# Altium PCB GATEWAY_PCB.PcbDoc (part 1 of 2)
Units mm, origin at the board's own origin, x right, y up, seen from the top; angles counter-clockwise.
Board outline 98.58 x 95.81 mm, 4 copper layers (SIGNAL_TOP, GND, POWER, SIGNAL_BOTTOM), stack 0.603 mm thick; 207 components, 120 nets, 669 pads, 510 vias.
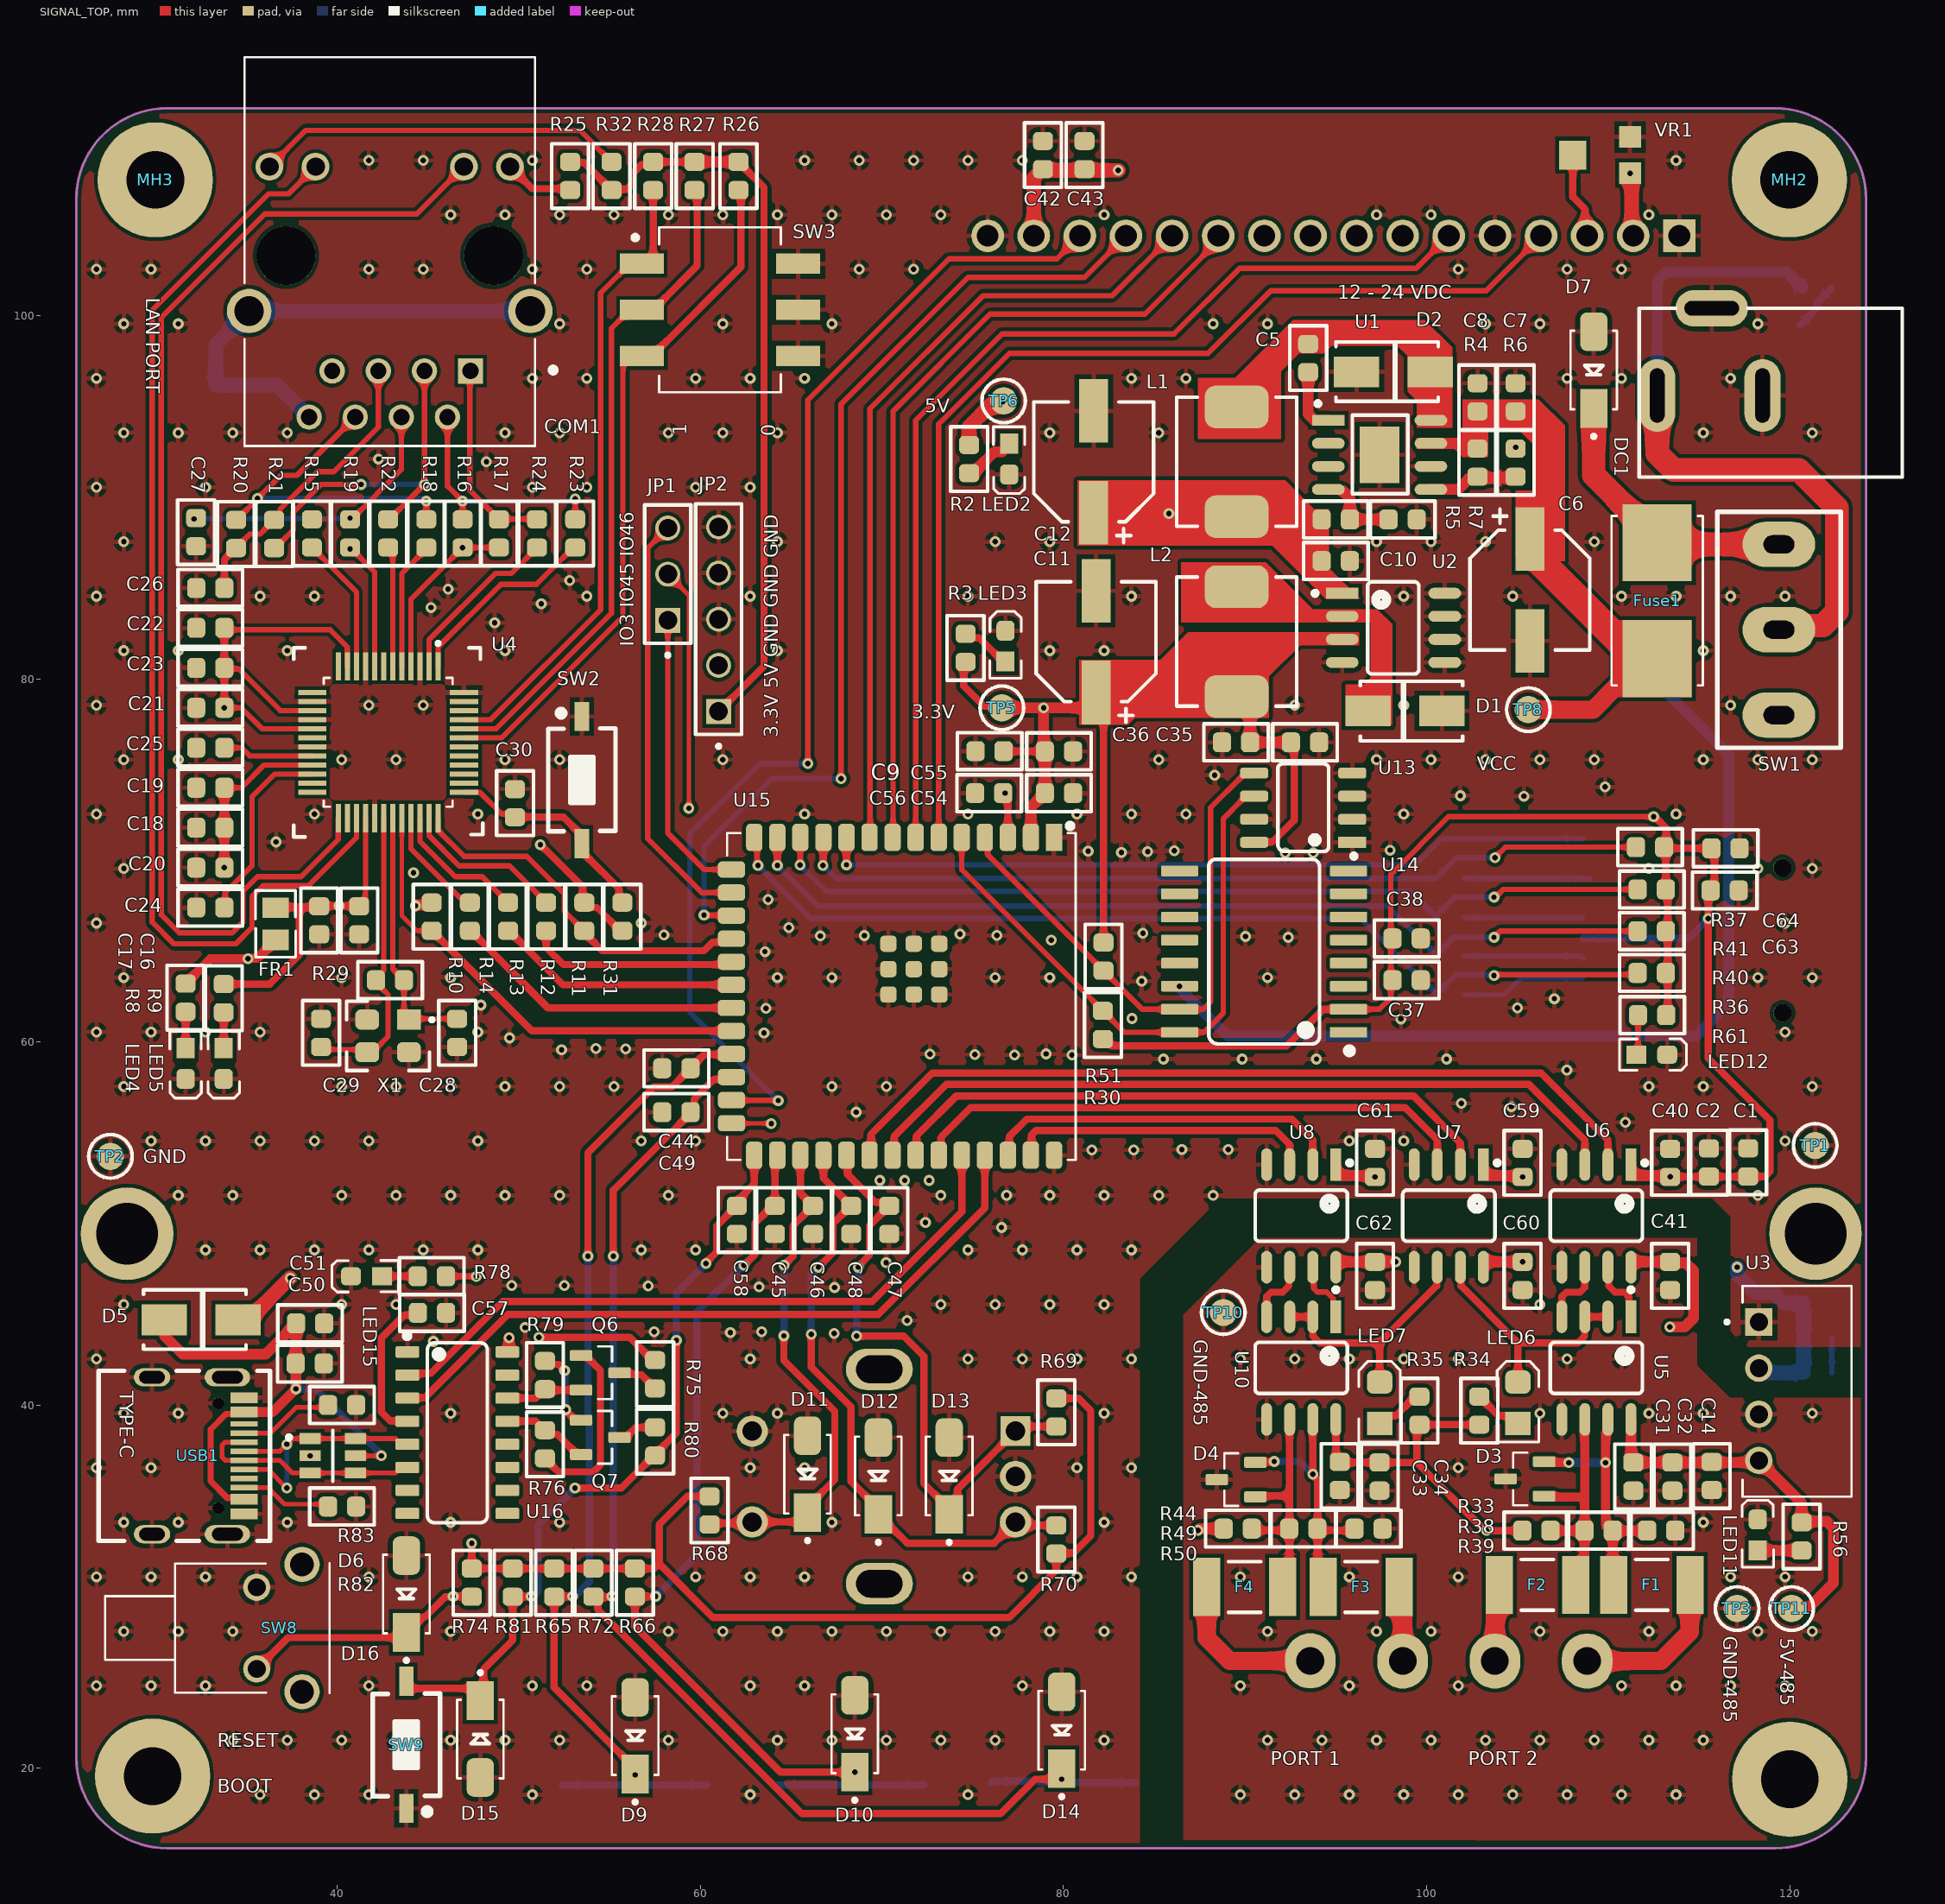
[diagram p0: SIGNAL_TOP view]
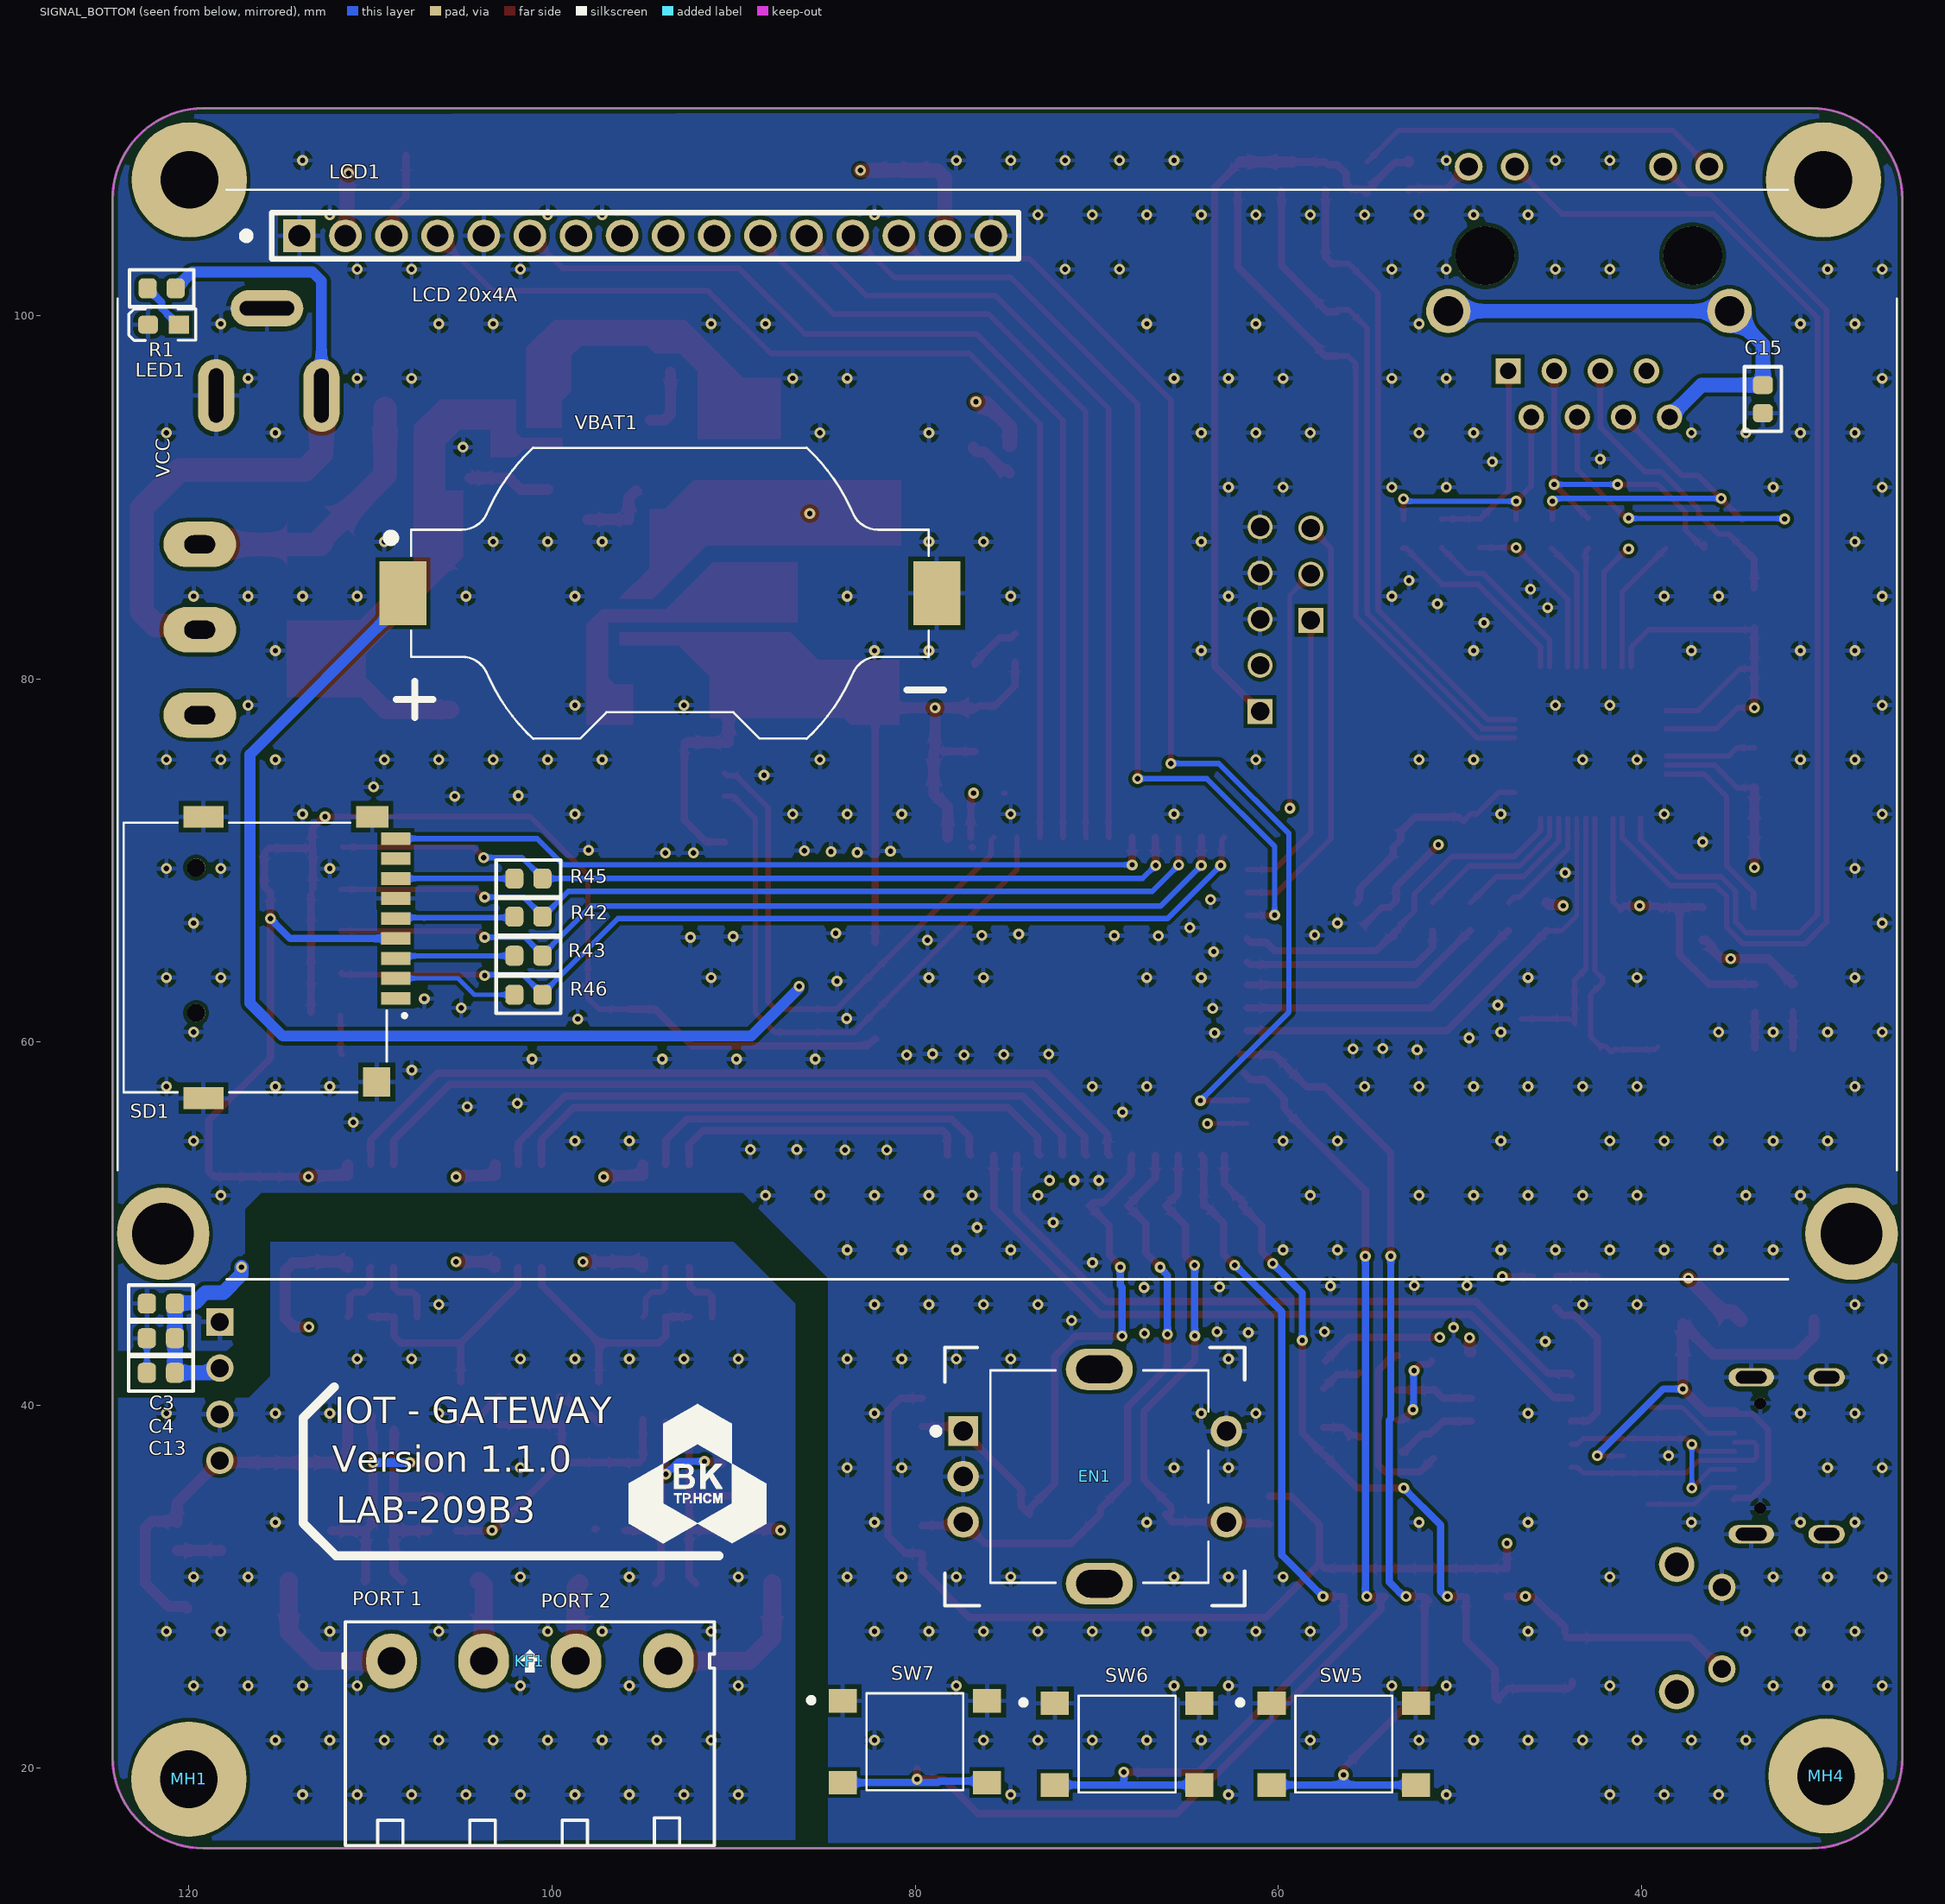
[diagram p1: SIGNAL_BOTTOM view, seen from below]
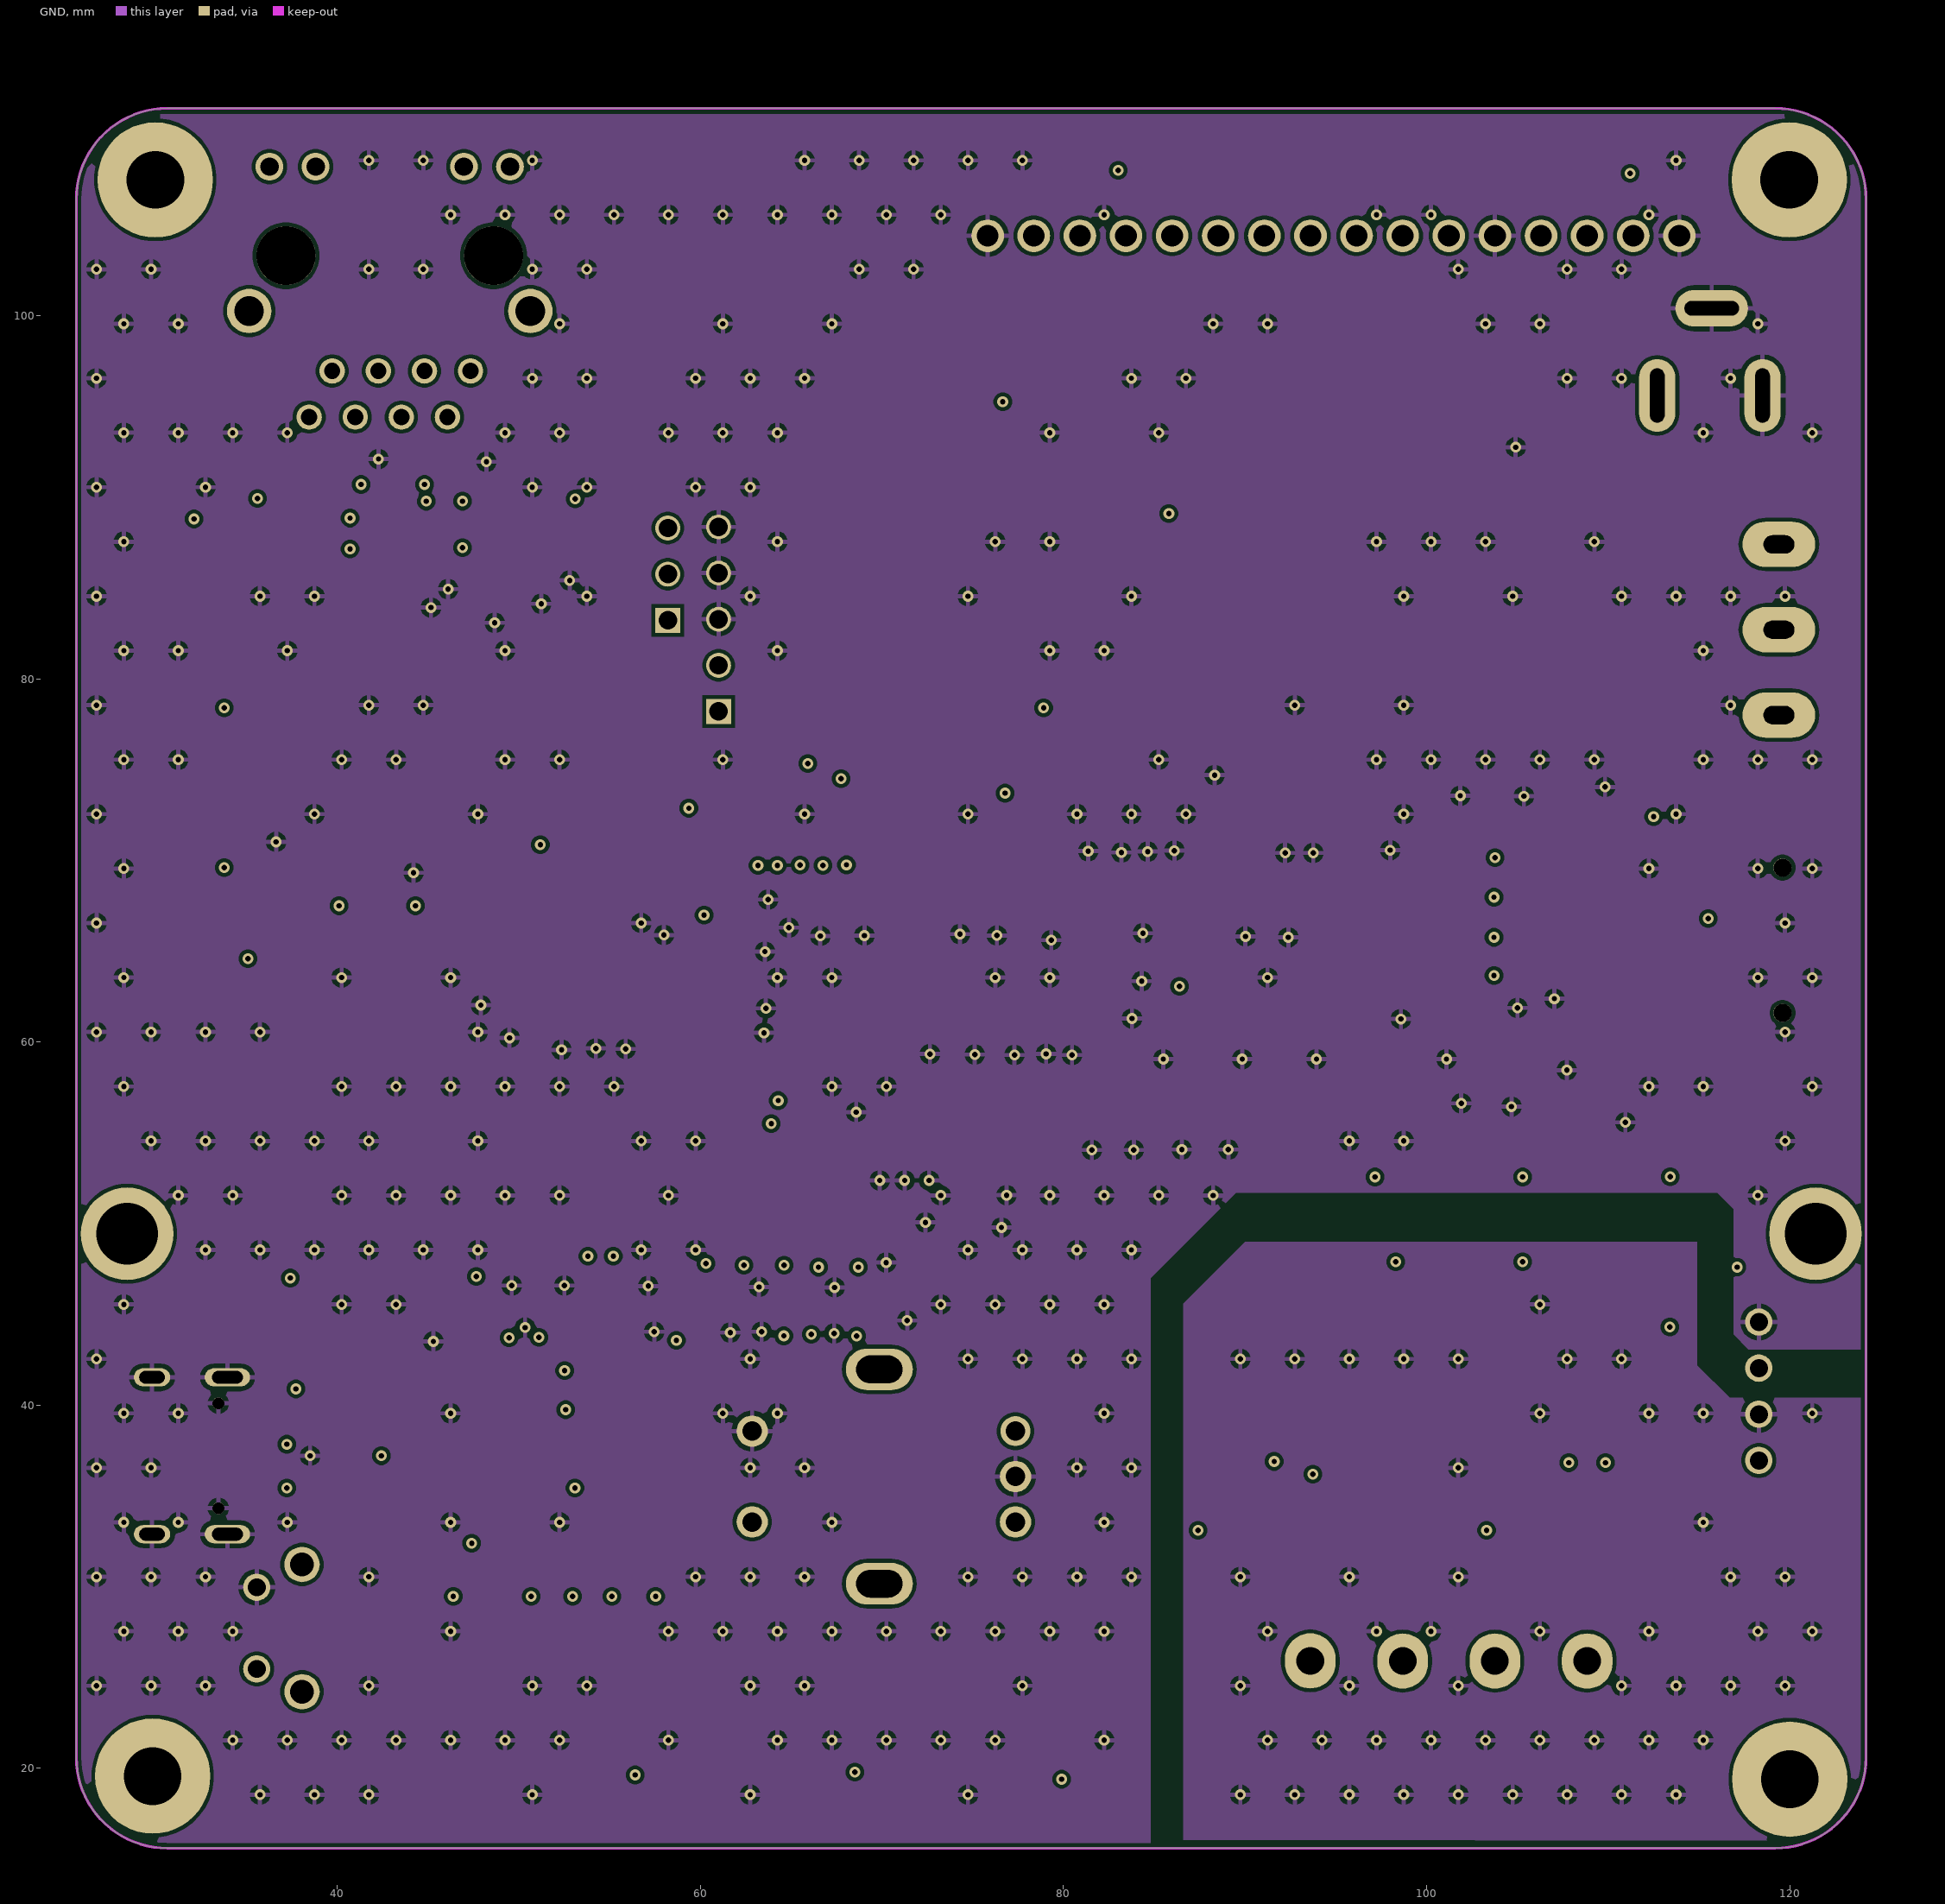
[diagram p2: GND]
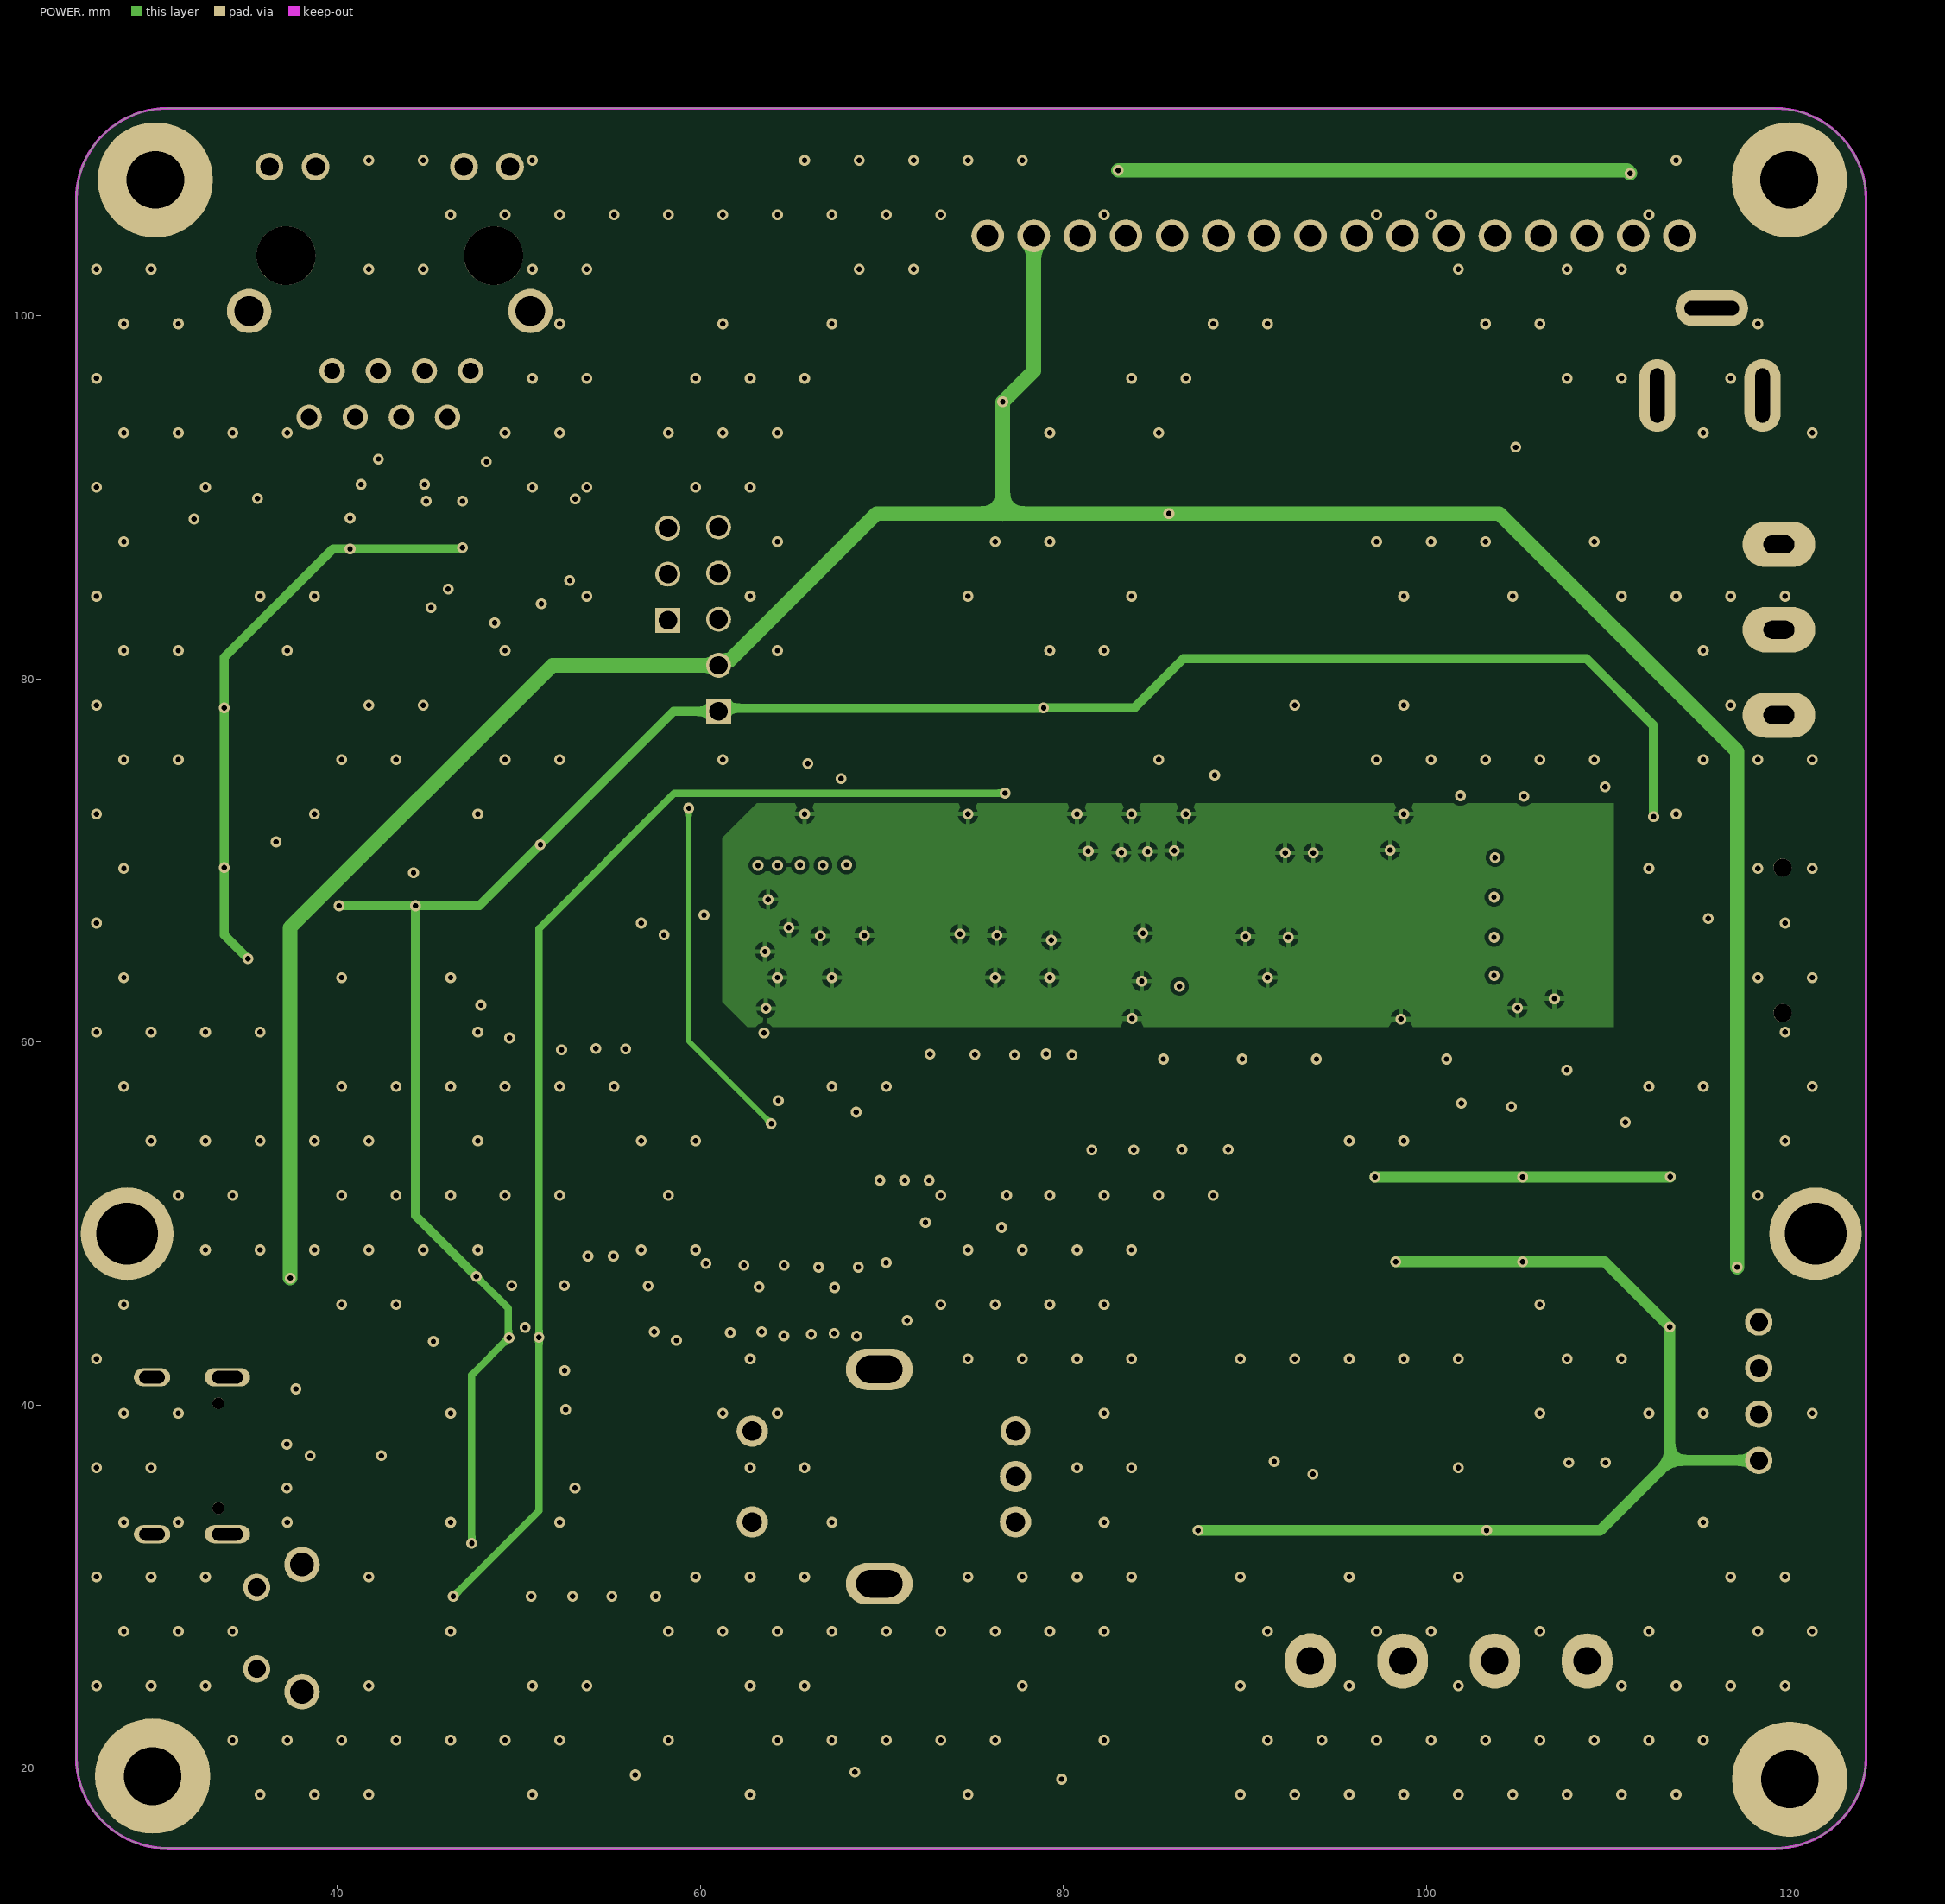
[diagram p3: POWER]

## Layer stack, top to bottom
Top Solder: solder mask 0.0102, Solder Resist, Dk 3.5
SIGNAL_TOP: signal copper 0.0356
Dielectric 2: prepreg 0.0711, PP-006, Dk 4.1
GND: signal copper 0.035
Dielectric 1: dielectric 0.32, FR-4, Dk 4.8
POWER: signal copper 0.035
Dielectric 3: prepreg 0.0711, PP-006, Dk 4.1
SIGNAL_BOTTOM: signal copper 0.0356
Bottom Solder: solder mask 0.0102, Solder Resist, Dk 3.5

## Board outline
25.622,20.6 25.622,106.411 cw(c30.622,106.411) 30.622,111.411 119.2,111.411 cw(c119.2,106.411) 124.2,106.411 124.2,20.6 cw(c119.2,20.6) 119.2,15.6 30.622,15.6 cw(c30.622,20.6)

## Design rules (kind name [scope] priority, off if disabled: settings)
Clearance [All] p1: gap=0.203 ignorepadtopadclearanceinfootprint=TRUE
DiffPairsRouting [All] p1: maxlimit=0.254 minlimit=0.254 mostfreqgap=0.254 toplayer_minwidth=0.254 toplayer_maxwidth=0.381 toplayer_prefwidth=0.381 midlayer1_minwidth=0.254 midlayer1_maxwidth=0.381 midlayer1_prefwidth=0.381 midlayer2_minwidth=0.254 midlayer2_maxwidth=0.381 midlayer2_prefwidth=0.381 bottomlayer_minwidth=0.254 bottomlayer_maxwidth=0.381 bottomlayer_prefwidth=0.381 maxuncoupledlength=12.7
HoleSize [All] p1: absolutevalues=TRUE maxlimit=6.3 minlimit=0.15 maxpercent=80.000 minpercent=20.000
HoleToHoleClearance [All] p1: gap=0.2 allowstackedmicrovias=TRUE
MinimumSolderMaskSliver [All] p1: minsoldermaskwidth=0.05
PolygonConnect [All] p1: connectstyle=Relief reliefconductorwidth=0.254 reliefentries=4 polygonreliefangle="90 Angle" airgapwidth=0.254
RoutingVias [All] p1: holewidth=0.3 width=0.6 viastyle="Through Hole" minholewidth=0.3 minwidth=0.6 maxholewidth=0.8 maxwidth=1
SilkToSilkClearance [All] p1: silktosilkclearance=0.2
SilkToSolderMaskClearance [IsPad] p1: minsilkscreentomaskgap=0.2 clearancetoexposedcopper=TRUE
SolderMaskExpansion [All] p1: expansion=0.102 istentingtop=FALSE
SupplyNets "Schematic Supply Nets_3" [InNet('VIN')] p1: voltage=0.000
SupplyNets "Schematic Supply Nets_10" [InNet('+VCC')] p2: voltage=0.000
SupplyNets "Schematic Supply Nets_9" [InNet('+5V_RS485')] p3: voltage=0.000
SupplyNets "Schematic Supply Nets_8" [InNet('+3.3V')] p4: voltage=0.000
SupplyNets "Schematic Supply Nets_5" [InNet('GND')] p5: voltage=0.000
SupplyNets "Schematic Supply Nets" [InNet('+5V')] p6: voltage=0.000
SupplyNets "Schematic Supply Nets_7" [InNet('+3.3V_RJ45')] p7: voltage=0.000
SupplyNets "Schematic Supply Nets_6" [InNet('VBAT')] p8: voltage=0.000
SupplyNets "Schematic Supply Nets_4" [InNet('VBUS')] p9: voltage=0.000
SupplyNets "Schematic Supply Nets_2" [InNet('GND_RS485')] p10: voltage=0.000
SupplyNets "Schematic Supply Nets_1" [InNet('GND_RJ45')] p11: voltage=0.000
UnRoutedNet [All] p1: checkbadconnections=TRUE
Width [All] p1: maxlimit=1.5 minlimit=0.25 preferedwidth=0.4
23 further rules are at their usual default settings.

## Classes and differential pairs
component class User_Interface: C42 C43 C44 C45 C46 C47 C48 C49 D9 D10 D11 D12 D13 D14 EN1 LCD1 R65 R66 R68 R69 R70 R72 SW5 SW6 SW7 VR1
component class RTC_and_EEPROM: c9 C35 C36 C37 C38 C63 C64 LED12 MH1 MH2 MH3 MH4 R30 R36 R37 R40 R41 R42 R43 R45 R46 R51 R61 SD1 U13 U14
component class RS485_Port: C31 C32 C33 C34 C40 C41 C59 C60 C61 C62 D3 D4 F1 F2 F3 F4 KF1 LED6 LED7 LED11 R33 R34 R35 R38 R39 R44 R49 R50 R56 TP10 TP11 U5 U6 U7 U8 U10
component class Power_Supply: C1 C2 C3 C4 C5 C6 C7 C8 C10 C11 C12 C13 C14 D1 D2 D7 DC1 Fuse1 L1 L2 LED1 LED2 LED3 R1 R2 R3 R4 R5 R6 R7 SW1 TP1 TP2 TP3 TP5 TP6 TP8 U1 U2 U3 VBAT1 VCC
component class MCU: C50 C51 C54 C55 C56 C57 C58 D5 D6 D15 D16 JP1 JP2 LED15 Q6 Q7 R74 R75 R76 R78 R79 R80 R81 R82 R83 SW8 SW9 U15 U16 USB1
component class Ethernet: C15 C16 C17 C18 C19 C20 C21 C22 C23 C24 C25 C26 C27 C28 C29 C30 COM1 FR1 LED4 LED5 R8 R9 R10 R11 R12 R13 R14 R15 R16 R17 R18 R19 R20 R21 R22 R23 R24 R25 R26 R27 R28 R29 R31 R32 SW2 SW3 U4 X1
differential pair DATA_D: +DATA_D_P -DATA_D_N

## Components (designator, comment, footprint, x,y, rotation, side; value= is the part's Value field where it differs from the comment)
C1 "10uF/50V" "CAP - 0603" 117.707,53.367 r90 top
C2 "0.1uF/50V" "CAP - 0603" 115.55,53.362 r90 top
C3 "10uF/50V" "CAP - 0603" 121.539,45.593 r0 bottom
C4 "0.1uF/50V" "CAP - 0603" 121.539,43.688 r0 bottom
C5 "10nF/50V" "CAP - 0603" 93.472,97.663 r90 top
C6 "100uF/35V" ALU_CAP_6.3_7.7 105.689,84.887 r270 top
C7 "4.7uF/50V" "CAP - 0603" 104.9,95.5 r90 top
C8 "4.7uF/50V" "CAP - 0603" 102.8,95.5 r90 top
C9 "10uF/50V" "CAP - 0603" 75.923,76.017 r0 top
C10 "10uF/50V" "CAP - 0603" 94.996,86.487 r0 top
C11 "330uF/6.3V" ALU_CAP_6.3_7.7 81.788,82.042 r90 top
C12 "220uF/16V" ALU_CAP_6.3_7.7 81.661,91.948 r90 top
C13 "4.7uF/50V" "CAP - 0603" 121.539,41.783 r0 bottom
C14 "10uF/50V" "CAP - 0603" 115.7,36.1 r270 top
C15 "1nF/50V" "CAP - 0603" 33.3,95.4 r90 bottom
C16 "10uF/50V" "CAP - 0603" 41.2,66.7 r90 top
C17 "100nF/50V" "CAP - 0603" 39,66.7 r90 top
C18 "100nF/50V" "CAP - 0603" 33,71.8 r0 top
C19 "100nF/50V" "CAP - 0603" 33,74 r0 top
C20 "100nF/50V" "CAP - 0603" 33,69.6 r0 top
C21 "100nF/50V" "CAP - 0603" 33,78.4 r0 top
C22 "100nF/50V" "CAP - 0603" 33,82.8 r0 top
C23 "100nF/50V" "CAP - 0603" 33,80.6 r0 top
C24 "10nF/50V" "CAP - 0603" 33,67.4 r0 top
C25 "4.7uF/50V" "CAP - 0603" 33,76.2 r0 top
C26 "10nF/50V" "CAP - 0603" 33,85 r0 top
C27 "22nF/50V" "CAP - 0603" 32.219,88.069 r90 top
C28 "18pF/50V" "CAP - 0603" 46.6,60.5 r90 top
C29 "18pF/50V" "CAP - 0603" 39.1,60.5 r270 top
C30 "0.1uF/50V" "CAP - 0603" 49.784,73.152 r270 top
C31 "0.1uF/50V" "CAP - 0603" 111.379,36.068 r270 top
C32 "10uF/50V" "CAP - 0603" 113.538,36.068 r270 top
C33 "0.1uF/50V" "CAP - 0603" 95.212,36.101 r270 top
C34 "10uF/50V" "CAP - 0603" 97.409,36.068 r270 top
C35 "10uF/50V" "CAP - 0603" 93.3,76.5 r180 top
C36 "0.1uF/50V" "CAP - 0603" 89.5,76.5 r0 top
C37 "10uF/50V" "CAP - 0603" 98.9,63.4 r180 top
C38 "0.1uF/50V" "CAP - 0603" 98.9,65.7 r180 top
C40 "0.1uF/50V" "CAP - 0603" 113.411,53.34 r90 top
C41 "0.1uF/50V" "CAP - 0603" 113.411,47.117 r270 top
C42 "10uF/50V" "CAP - 0603" 78.867,108.839 r270 top
C43 "0.1uF/50V" "CAP - 0603" 81.153,108.839 r270 top
C44 "0.1uF/50V" "CAP - 0603" 58.674,58.547 r0 top
C45 "0.1uF/50V" "CAP - 0603" 64.1,50.2 r90 top
C46 "0.1uF/50V" "CAP - 0603" 66.2,50.2 r90 top
C47 "0.1uF/50V" "CAP - 0603" 70.4,50.2 r90 top
C48 "0.1uF/50V" "CAP - 0603" 68.3,50.2 r90 top
C49 "0.1uF/50V" "CAP - 0603" 58.674,56.134 r0 top
C50 "0.1uF/50V" "CAP - 0603" 38.481,42.291 r180 top
C51 "10uF/50V" "CAP - 0603" 38.5,44.5 r180 top
C54 "10uF/50V" "CAP - 0603" 79.748,73.7 r180 top
C55 "0.1uF/50V" "CAP - 0603" 79.748,76 r180 top
C56 "0.1uF/50V" "CAP - 0603" 75.9,73.7 r0 top
C57 "100nF/50V" "CAP - 0603" 45.212,45.085 r180 top
C58 "0.1uF/50V" "CAP - 0603" 62,50.2 r90 top
C59 "0.1uF/50V" "CAP - 0603" 105.283,53.34 r90 top
C60 "0.1uF/50V" "CAP - 0603" 105.283,47.117 r270 top
C61 "0.1uF/50V" "CAP - 0603" 97.155,53.34 r90 top
C62 "0.1uF/50V" "CAP - 0603" 97.155,47.117 r270 top
C63 "10uF/50V" "CAP - 0603" 116.414,68.343 r180 top
C64 "0.1uF/50V" "CAP - 0603" 116.462,70.663 r180 top
COM1 "RJ45" RJ45 42.885,103.3 r0 top
D1 "SS54" SS54 98.806,78.232 r180 top
D2 "SS54" SS54 98.171,96.901 r0 top
D3 "SM712-02HTG" SOT23-3 105.41,35.941 r180 top
D4 "SM712-02HTG" SOT23-3 89.5,35.9 r180 top
D5 "SS54" SS54 32.5,44.7 r0 top
D6 "SRV05-4" SOT-23-6 39.751,37.211 r0 top
D7 "SMAJ28A" DO-214AC 109.2,97 r90 top
D9 "SMAJ5.0A" DO-214AC 56.4,21.8 r90 top
D10 "SMAJ5.0A" DO-214AC 68.5,21.9 r90 top
D11 "SMAJ5.0A" DO-214AC 65.9,36.2 r90 top
D12 "SMAJ5.0A" DO-214AC 69.8,36.1 r90 top
D13 "SMAJ5.0A" DO-214AC 73.7,36.1 r90 top
D14 "SMAJ5.0A" DO-214AC 79.9,22.1 r90 top
D15 "SMAJ5.0A" DO-214AC 47.875,21.611 r270 top
D16 "SMAJ5.0A" DO-214AC 43.8,29.6 r90 top
DC1 "Jack_DC" "DC_5.5 x 2.1mm" 115.6,95.6 r180 top
EN1 "Encoder - EC11" "ENCODER - EC11" 69.85,36.068 r180 bottom
F1 "MF-MSMF020-2" "FUSE 4.55X3.24 MM" 112.4,30.1 r0 top
F2 "MF-MSMF020-2" "FUSE 4.55X3.24 MM" 106.1,30.1 r180 top
F3 "MF-MSMF020-2" "FUSE 4.55X3.24 MM" 96.393,29.988 r0 top
F4 "MF-MSMF020-2" "FUSE 4.55X3.24 MM" 89.975,29.988 r180 top
FR1 "120R" FR-0805 36.6,66.5 r270 top
Fuse1 "Fuse - 4A" SMD-2 112.7,84.3 r270 top
JP1 "JUMP 3 PINS" "JUMP 3 PINS" 58.225,85.76 r90 top locked
JP2 "JUMP 5 PINS" "JUMP 5 PINS" 61,78.2 r90 top locked
KF1 "KF 4 Pins" KF_4 108.839,25.908 r180 bottom
L1 "15uH/3A" L_SMD_0630 89.535,91.948 r270 top
L2 "22uH/3A" L_SMD_0630 89.535,82.042 r270 top
LCD1 "LCD 20x4A" LCD-20X4A-4-HOLES 113.919,104.394 r180 bottom locked
LED1 "RED" RED_LED_0603 121.4,99.5 r0 bottom
LED2 "RED" RED_LED_0603 77,92.1 r270 top
LED3 "GREEN" GREEN_LED_0603 76.8,81.8 r90 top
LED4 "RED" RED_LED_0603 31.64,58.81 r270 top
LED5 "RED" RED_LED_0603 33.74,58.81 r270 top
LED6 "YELLOW" YELLOW_LED_0805 105.029,38.989 r90 top
LED7 "YELLOW" YELLOW_LED_0805 97.409,38.989 r90 top
LED11 "RED" RED_LED_0603 118.238,32.856 r90 top
LED12 "RED" RED_LED_0603 112.4,59.3 r0 top
LED15 "RED_DEBUG" RED_LED_0603 41.6,47.1 r180 top
MH1 "MOUNTING HOLE" "Mounting hole_2"#1 119.975,19.425 r180 bottom
MH2 "MOUNTING HOLE" "Mounting hole_2"#1 120,107.5 r0 top
MH3 "MOUNTING HOLE" "Mounting hole_2"#1 30,107.5 r0 top
MH4 "MOUNTING HOLE" "Mounting hole_2"#2 29.8,19.6 r180 bottom
Q6 "SS8050" SOT23-3 54.483,41.783 r0 top
Q7 "SS8050" SOT23-3 54.483,38.227 r0 top
R1 "10K/1%" "RES - 0603" 121.5,101.5 r0 bottom
R2 "1K/1%" "RES - 0603" 74.8,92.1 r270 top
R3 "330R/1%" "RES - 0603" 74.6,81.7 r90 top
R4 "10K/1%" "RES - 0603" 102.8,91.9 r270 top
R5 "1K/1%" "RES - 0603" 94.996,88.773 r0 top
R6 "1.5K/1%" "RES - 0603" 104.9,91.9 r90 top
R7 "330R/1%" "RES - 0603" 98.679,88.773 r0 top
R8 "330R/1%" "RES - 0603" 31.64,62.435 r270 top
R9 "330R/1%" "RES - 0603" 33.74,62.41 r270 top
R10 "10K/1%" "RES - 0603" 45.2,66.9 r90 top
R11 "10K/1%" "RES - 0603" 53.6,66.9 r90 top
R12 "22R/1%" "RES - 0603" 51.5,66.9 r270 top
R13 "22R/1%" "RES - 0603" 49.4,66.9 r270 top
R14 "22R/1%" "RES - 0603" 47.3,66.9 r270 top
R15 "12.4K/1%" "RES - 0603" 38.6,88 r270 top
R16 "49.9R/1%" "RES - 0603" 46.9,88 r270 top
R17 "49.9R/1%" "RES - 0603" 48.9,88 r270 top
R18 "22R/1%" "RES - 0603" 44.9,88 r90 top
R19 "22R/1%" "RES - 0603" 40.7,88 r90 top
R20 "49.9R/1%" "RES - 0603" 34.419,87.969 r90 top
R21 "49.9R/1%" "RES - 0603" 36.519,87.969 r270 top
R22 "22R/1%" "RES - 0603" 42.8,88 r90 top
R23 "22R/1%" "RES - 0603" 53.1,88 r90 top
R24 "22R/1%" "RES - 0603" 51,88 r90 top
R25 "330R/1%" "RES - 0603" 52.82,107.684 r270 top
R26 "10K/1%" "RES - 0603" 62.091,107.684 r90 top
R27 "10K/1%" "RES - 0603" 59.678,107.684 r90 top
R28 "10K/1%" "RES - 0603" 57.392,107.684 r90 top
R29 "1M/1%" "RES - 0603" 42.9,63.4 r0 top
R30 "4.7K/1%" "RES - 0603" 82.169,60.935 r270 top
R31 "10K/1%" "RES - 0603" 55.7,66.9 r90 top
R32 "330R/1%" "RES - 0603" 55.106,107.684 r90 top
R33 "2.2K/1%" "RES - 0603" 112.916,33.089 r0 top
R34 "1K/1%" "RES - 0603" 102.9,39.7 r90 top
R35 "1K/1%" "RES - 0603" 99.6,39.7 r90 top
R36 "10K/1%" "RES - 0603" 112.4,63.8 r180 top
R37 "10K/1%" "RES - 0603" 112.302,70.727 r180 top
R38 "120R/1%" "RES - 0603" 109.474,33.089 r0 top
R39 "2.2K/1%" "RES - 0603" 106.045,33.089 r0 top
R40 "10K/1%" "RES - 0603" 112.4,66.1 r180 top
R41 "10K/1%" "RES - 0603" 112.4,68.4 r180 top
R42 "0R/1%" "RES - 0603" 101.3,66.9 r180 bottom
R43 "0R/1%" "RES - 0603" 101.3,64.75 r180 bottom
R44 "2.2K/1%" "RES - 0603" 96.8,33.2 r0 top
R45 "0R/1%" "RES - 0603" 101.3,69 r180 bottom
R46 "0R/1%" "RES - 0603" 101.3,62.6 r180 bottom
R49 "120R/1%" "RES - 0603" 93.2,33.2 r0 top
R50 "2.2K/1%" "RES - 0603" 89.6,33.2 r0 top
R51 "4.7K/1%" "RES - 0603" 82.2,64.7 r90 top
R56 "1K/1%" "RES - 0603" 120.65,32.766 r270 top
R61 "330R/1%" "RES - 0603" 112.422,61.478 r180 top
R65 "10K/1%" "RES - 0603" 51.943,30.226 r90 top
R66 "10K/1%" "RES - 0603" 56.388,30.226 r90 top
R68 "10K/1%" "RES - 0603" 60.5,34.2 r90 top
R69 "10K/1%" "RES - 0603" 79.6,39.6 r90 top
R70 "10K/1%" "RES - 0603" 79.6,32.6 r270 top
R72 "10K/1%" "RES - 0603" 54.102,30.226 r270 top
R74 "10K/1%" "RES - 0603" 47.4,30.225 r90 top
R75 "0R/1%" "RES - 0603" 57.5,41.7 r270 top
R76 "10K/1%" "RES - 0603" 51.435,37.846 r270 top
R78 "330R/1%" "RES - 0603" 45.2,47.1 r180 top
R79 "10K/1%" "RES - 0603" 51.435,41.656 r90 top
R80 "0R/1%" "RES - 0603" 57.5,38 r90 top
R81 "10K/1%" "RES - 0603" 49.657,30.226 r270 top
R82 "5.1K/1%" "RES - 0603" 40.259,34.417 r0 top
R83 "5.1K/1%" "RES - 0603" 40.259,40.005 r0 top
SD1 "SD Card" "MICRO SD CARD" 109.9,72.4 r270 bottom
SW1 "Switch" Dip_Switch_3_pins_0 119.4,82.7 r270 top
SW2 "Button 2 Pins" "SMD SWITCH 2 PINS" 53.467,74.422 r270 top
SW3 "DIP Switch 3 Pins" "SMD - SW - 3PINS" 61.075,100.318 r0 top
SW5 "Button 4 Pins" SW-SMD-6x6mm 56.388,21.336 r180 bottom
SW6 "Button 4 Pins" SW-SMD-6x6mm 68.326,21.336 r180 bottom
SW7 "Button 4 Pins" SW-SMD-6x6mm 80.01,21.463 r180 bottom
SW8 "Button 2 Pins" SW-DIP-6x6mm 38.05,31.227 r270 top
SW9 "Button 2 Pins" "SMD SWITCH 2 PINS" 43.8,21.3 r90 top
TP1 "GND" "TEST POINT" 121.4,54.3 r0 top
TP2 "GND" "Test Point" 27.5,53.7 r0 top
TP3 "GND_RS485" "TEST POINT" 117.1,28.8 r0 top
TP5 "+3.3V" "TEST POINT" 76.6,78.4 r0 top
TP6 "+5V" "TEST POINT" 76.7,95.3 r0 top
TP8 "+VCC" "TEST POINT" 105.6,78.3 r0 top
TP10 "GND_RS485" "TEST POINT" 88.8,45.1 r90 top
TP11 "GND_RS485" "TEST POINT" 120.1,28.8 r90 top
U1 "TPS5430" TPS5430 97.434,92.354 r0 top
U2 "XL1509" SOP_8 98.171,82.804 r0 top
U3 "B0505S/1W" B0505S/1W 120.396,40.767 r270 top
U4 "W5500" LQFP-48 42.8,76.5 r270 top
U5 "MAX485ESA" SOP_8 109.347,42.037 r270 top
U6 "ADUM1201" SOP_8 109.347,50.419 r270 top
U7 "ADUM1200" SOP_8 101.219,50.419 r270 top
U8 "ADUM1201" SOP_8 93.091,50.419 r270 top
U10 "MAX485ESA" SOP_8 93.091,42.037 r270 top
U13 "AT24C256C" SOIC-8 93.2,72.9 r180 top
U14 "DS3231SN#" "SOIC -16" 91.045,64.975 r180 top
U15 "ESP32-S3-WROOM-1U-N8R2" ESP32-S3-WROOM-1U-N8R2 79.472,71.261 r270 top
U16 "CH340C" SOIC127P600X180-16N 46.609,38.481 r0 top
USB1 "USB Type C" Type-C-16Pins 30.861,37.211 r270 top
VBAT1 "3V" "CR2032 - SMD" 93.504,84.709 r180 bottom
VR1 "20K" "VR 3X3" 109.601,108.839 r90 top
X1 "CRYSTAL 25MHz" "CRYSTAL - 3.2 X 2.5 MM" 42.794,60.333 r180 top

## Footprints (in the part's own frame and the unit in brackets; to place one, negate y for a bottom-side part, rotate by r counter-clockwise, add the part's x,y. Pads: shape width x height; smd on the part's side, far side on the other; paste and mask are expansions set on the pad)
ALU_CAP_6.3_7.7 [mm] "6.3x7.7mm"
  rect 3.5x1.6 smd: 1(-2.8,0) 2(2.8,0)
  silkscreen extent -4.44,-3.3 3.3,3.3, body extent -3.65,-3.3 3.65,3.3, height 7.65
B0505S/1W [mm]
  rect 1.508x1.508 / inner round 1.508 / far side rect 1.508x1.508 hole 1: 1(-3.81,-2.1)
  round 1.508 hole 1: 2(-1.27,-2.1) 3(1.27,-2.1) 4(3.81,-2.1)
  silkscreen extent -5.8,-3.95 5.8,3, body extent -5.8,-3.01 5.8,2.99, height 10.16
"CAP - 0603" [mm] "Capacitor SMD - 1608 - KEMET"
  rrect50% 1x1.1 smd: 1(-0.775,0) 2(0.775,0)
  silkscreen extent -1.78,-1.02 1.78,1.02, body extent -0.87,-0.48 0.87,0.48, height 1
"CR2032 - SMD" [mm] "SMD"
  rect 2.6x3.5 smd: N(14.7,0) P(-14.7,0)
  silkscreen extent -15.42,-8.01 15.06,8.01, body extent -15.65,-8 15.65,8, height 5.55
"CRYSTAL - 3.2 X 2.5 MM" [mm] "SMD"
  rect 1.3x1.1 smd: 1(-1.15,-0.9)
  rrect50% 1.3x1.1 smd: 2(1.15,-0.9) 3(1.15,0.9) 4(-1.15,0.9)
  silkscreen extent -2.51,-1.91 2.29,1.91, body extent -1.6,-1.25 1.6,1.25, height 0.8
"DC_5.5 x 2.1mm" [mm]
  oval 2x4 hole 0.8 slot 3 at 90 deg: 1(2.9,0) 2(-2.9,0)
  oval 4x2 hole 0.8 slot 3 at 0 deg: 3(-0.1,-4.8)
  silkscreen extent -10.6,-4.8 3.9,4.5, body extent -10.6,-4.9 3.9,4.5, height 10.7
Dip_Switch_3_pins_0 [mm]
  oval 2.5x4 hole 1 slot 1.7 at 90 deg: 1(-4.7,0) 2(0,0) 3(4.7,0)
  silkscreen extent -6.5,-3.4 6.5,3.4, body extent -6.5,-3.4 6.5,3.4, height 10.76
DO-214AC [mm] "SMD"
  rrect50% 2.12x1.5 smd: A(2.115,0)
  rect 2.12x1.5 smd: C(-2.115,0)
  silkscreen extent -3.76,-1.28 2.16,1.28, body extent -2.54,-1.29 2.54,1.29, height 2.65
"ENCODER - EC11" [mil]
  rect 65x65 / inner round 65 / far side rect 65x65 hole 42: A(-295.28,98.43)
  round 68 hole 42: B(-295.28,-98.43) C(-295.28,0) D(275.59,98.43) E(275.59,-98.43)
  oval 145x90 hole 60 slot 100 at 0 deg: SH1(0,232.28) SH2(0,-232.28)
  silkscreen extent -358,-280 315,280, body extent -303,-276 283,276, height 834
ESP32-S3-WROOM-1U-N8R2 [mm] "SMD"
  rect 1.5x0.9 smd: 1(0,0)
  rrect50% 1.5x0.9 smd: 2(0,-1.27) 3(0,-2.54) 4(0,-3.81) 5(0,-5.08) 6(0,-6.35) 7(0,-7.62) 8(0,-8.89) 9(0,-10.16) 10(0,-11.43) 11(0,-12.7) 12(0,-13.97) 13(0,-15.24) 14(0,-16.51) 27(17.5,-16.51) 28(17.5,-15.24) 29(17.5,-13.97) 30(17.5,-12.7) 31(17.5,-11.43) 32(17.5,-10.16) 33(17.5,-8.89) 34(17.5,-7.62) 35(17.5,-6.35) 36(17.5,-5.08) 37(17.5,-3.81) 38(17.5,-2.54) 39(17.5,-1.27) 40(17.5,0)
  rrect50% 0.9x1.5 smd: 15(1.765,-17.76) 16(3.035,-17.76) 17(4.305,-17.76) 18(5.575,-17.76) 19(6.845,-17.76) 20(8.115,-17.76) 21(9.385,-17.76) 22(10.655,-17.76) 23(11.925,-17.76) 24(13.195,-17.76) 25(14.465,-17.76) 26(15.735,-17.76)
  rrect50% 0.9x0.9 smd: 41_1(5.85,-6.32) 41_2(7.25,-6.32) 41_3(8.65,-6.32) 41_4(5.85,-7.72) 41_5(7.25,-7.72) 41_6(8.65,-7.72) 41_7(5.85,-9.12) 41_8(7.25,-9.12) 41_9(8.65,-9.12)
  silkscreen extent -0.73,-18.01 17.75,1.19, body extent -0.25,-18.01 17.75,1.19, height 3.35
FR-0805 [mm] "SMD"
  rect 1.14x1.47 smd: 1(-0.89,0) 2(0.89,0)
  silkscreen extent -1.84,-1.1 1.83,1.1, body extent -1,-0.63 1,0.63, height 1.05
"FUSE 4.55X3.24 MM" [mm]
  rect 1.5x3.2 smd: 1(-2.1,0) 2(2.1,0)
  silkscreen extent -0.89,-1.4 0.89,1.4, body extent -2.27,-1.62 2.27,1.62, height 0.85
GREEN_LED_0603 [mm] "SMD"
  rect 1.1x1 smd mask+0.1: 1(-0.853,-0.002)
  rrect50% 1.1x1 smd mask+0.1: 2(0.847,-0.002)
  silkscreen extent -1.78,-0.88 1.91,0.86, body extent -0.81,-0.51 0.81,0.49, height 0.98
"JUMP 3 PINS" [mm] "JUMP DIP"
  rect 1.37x1.37 hole 1.02: 01(-2.54,0.025)
  round 1.37 hole 1.02: 02(0,0.025) 03(2.54,0.025)
  silkscreen extent -4.56,-1.24 3.81,1.3, body extent -3.81,-1.19 3.81,1.3, height 8.48
"JUMP 5 PINS" [mm] "JUMP 5 PINS DIP"
  rect 1.37x1.37 hole 1.02: 01(0,0)
  round 1.37 hole 1.02: 02(2.54,0) 03(5.08,0) 04(7.62,0) 05(10.16,0)
  silkscreen extent -2.02,-1.27 11.43,1.27, body extent -1.4,-1.27 11.43,1.27, height 8.38
KF_4 [mil]
  oval 110x120 hole 60: 1(0,0) 2(200,0) 3(400.06,0.06) 4(600.39,0.39)
  silkscreen extent -105,-400 700,85, body extent -87,-406 690,66, height 334
L_SMD_0630 [mm] "SMD"
  rrect50% 2.35x3.5 smd: 1(-3.025,0) 2(3.025,0)
  silkscreen extent -3.56,-3.3 3.56,3.3, body extent -3.6,-3.32 3.6,3.32, height 3.03
LCD-20X4A-4-HOLES [mm]
  rect 1.8x1.8 / inner round 1.8 / far side rect 1.8x1.8 hole 1.2: 1(0,0)
  round 1.8 hole 1.2: 2(2.54,0) 3(5.08,0) 4(7.62,0) 5(10.16,0) 6(12.7,0) 7(15.24,0) 8(17.78,0) 9(20.32,0) 10(22.86,0) 11(25.4,0) 12(27.94,0) 13(30.48,0) 14(33.02,0) 15(35.56,0) 16(38.1,0)
  round 5.1 hole 3.4: S3(-7.5,-54.96) S4(85.5,-54.96)
  silkscreen extent -10,-57.46 88,2.54, body extent -10,-57.46 88,2.54, height 20.5
LQFP-48 [mm] "Low Profile Quad Flat Pack (LQFP), 0.50 mm pitch; square, 12 pin X 12 pin, 7.00 mm L X 7.00 mm W X 1.60 mm H body"
  rect 1.56x0.28 smd: 1(-4.18,2.75) 2(-4.18,2.25) 3(-4.18,1.75) 4(-4.18,1.25) 5(-4.18,0.75) 6(-4.18,0.25) 7(-4.18,-0.25) 8(-4.18,-0.75) 9(-4.18,-1.25) 10(-4.18,-1.75) 11(-4.18,-2.25) 12(-4.18,-2.75) 25(4.18,-2.75) 26(4.18,-2.25) 27(4.18,-1.75) 28(4.18,-1.25) 29(4.18,-0.75) 30(4.18,-0.25) 31(4.18,0.25) 32(4.18,0.75) 33(4.18,1.25) 34(4.18,1.75) 35(4.18,2.25) 36(4.18,2.75)
  rect 0.28x1.56 smd: 13(-2.75,-4.18) 14(-2.25,-4.18) 15(-1.75,-4.18) 16(-1.25,-4.18) 17(-0.75,-4.18) 18(-0.25,-4.18) 19(0.25,-4.18) 20(0.75,-4.18) 21(1.25,-4.18) 22(1.75,-4.18) 23(2.25,-4.18) 24(2.75,-4.18) 37(2.75,4.18) 38(2.25,4.18) 39(1.75,4.18) 40(1.25,4.18) 41(0.75,4.18) 42(0.25,4.18) 43(-0.25,4.18) 44(-0.75,4.18) 45(-1.25,4.18) 46(-1.75,4.18) 47(-2.25,4.18) 48(-2.75,4.18)
  silkscreen extent -5.55,-5.21 5.21,5.21, body extent -4.5,-4.5 4.5,4.5, height 1.6
"MICRO SD CARD" [mm] "SMD"
  rect 0.7x1.6 smd: 1(10,1.3) 2(8.9,1.3) 3(7.8,1.3) 4(6.7,1.3) 5(5.6,1.3) 6(4.5,1.3) 7(3.4,1.3) 8(2.3,1.3) CD(1.2,1.3)
  rect 1.2x1.8 smd: G1(0,0)
  rect 1.6x1.5 smd: G2(14.6,0.25)
  rect 1.2x2.2 smd: G3(0,-9.3) G4(15.5,-9.3)
  round 1 hole 1 unplated: ""(2.8,-9.7) ""(10.8,-9.7)
  silkscreen extent 0.33,-13.7 15.17,1.88, body extent -0.38,-13.78 15.77,1.27, height 1.8
"Mounting hole_2"#1 [mil]
  round 250 hole 125.2: 1(-1,-1)
"Mounting hole_2"#2 [mil]
  round 250 hole 125.2: SS(-1,-1)
RED_LED_0603 [mm] "SMD"
  rect 1.1x1 smd mask+0.1: 1(-0.852,0.001)
  rrect50% 1.1x1 smd mask+0.1: 2(0.848,0.001)
  silkscreen extent -1.78,-0.87 1.91,0.87, body extent -0.81,-0.5 0.81,0.5, height 0.98
"RES - 0603" [mm] "Resistor SMD - 1.6x0.8mm - YAGEO"
  rrect50% 1x1.1 smd: 1(-0.775,0) 2(0.775,0)
  silkscreen extent -1.78,-1.02 1.78,1.02, body extent -0.85,-0.45 0.85,0.45, height 0.55
RJ45 [mm]
  rect 1.398x1.398 / inner round 1.398 / far side rect 1.398x1.398 hole 0.89: 1(4.45,-6.35)
  round 1.398 hole 0.89: 2(3.18,-8.89) 3(1.91,-6.35) 4(0.64,-8.89) 5(-0.63,-6.35) 6(-1.9,-8.89) 7(-3.17,-6.35) 8(-4.44,-8.89)
  round 1.53 hole 1.02: 9(6.625,4.9) 10(4.085,4.9) 11(-4.085,4.9) 12(-6.625,4.9)
  round 2.445 hole 1.63: 15(7.745,-3.05) 16(-7.745,-3.05)
  round 3.25 hole 3.25 unplated: ""(-5.715,0) ""(5.715,0)
  silkscreen extent -8,-10.48 9.15,10.92, body extent -8.02,-10.4 8.02,10.9, height 13.5
"SMD - SW - 3PINS" [mm] "Pitch - 2.54mm"
  rect 2.44x1.13 smd: 1(-4.305,2.54) 1_1(4.305,2.54) 2(-4.305,0) 2_1(4.305,0) 3(-4.305,-2.54) 3_1(4.305,-2.54)
  silkscreen extent -4.78,-4.54 3.35,4.54, body extent -4.95,-4.54 4.95,4.54, height 4.2
"SMD SWITCH 2 PINS" [mm] "SMD"
  rect 1.6x0.8 smd: 1(-3.502,0) 2(3.498,0)
  silkscreen extent -3.78,-1.85 2.82,1.85, body extent -3.05,-1.85 3.05,1.85, height 2.5
SMD-2 [mil]
  rect 167x150 smd paste+0 mask+4.02: 1(-125.5,0) 2(125.5,0)
  silkscreen extent -184,-99 184,99, body extent -192,-99 192,99, height 150
SOIC127P600X180-16N [mm]
  rrect25% 1.31x0.62 smd: 1(-2.75,4.445) 2(-2.75,3.175) 3(-2.75,1.905) 4(-2.75,0.635) 5(-2.75,-0.635) 6(-2.75,-1.905) 7(-2.75,-3.175) 8(-2.75,-4.445) 9(2.75,-4.445) 10(2.75,-3.175) 11(2.75,-1.905) 12(2.75,-0.635) 13(2.75,0.635) 14(2.75,1.905) 15(2.75,3.175) 16(2.75,4.445)
  silkscreen extent -2.87,-4.95 1.65,5.43, body extent -3,-5 3,5, height 1.8
"SOIC -16" [mm] "SMD"
  rect 2.05x0.59 smd: 1(-4.655,4.445)
  rrect25% 2.05x0.59 smd: 2(-4.655,3.175) 3(-4.655,1.905) 4(-4.655,0.635) 5(-4.655,-0.635) 6(-4.655,-1.905) 7(-4.655,-3.175) 8(-4.655,-4.445) 9(4.655,-4.445) 10(4.655,-3.175) 11(4.655,-1.905) 12(4.655,-0.635) 13(4.655,0.635) 14(4.655,1.905) 15(4.655,3.175) 16(4.655,4.445)
  silkscreen extent -4.8,-5.08 3.05,5.56, body extent -5.16,-5.15 5.16,5.15, height 2.65
SOIC-8 [mm] "SMD"
  rect 1.55x0.6 smd: 1(-2.7,1.905)
  rrect50% 1.55x0.6 smd: 2(-2.7,0.635) 3(-2.7,-0.635) 4(-2.7,-1.905) 5(2.7,-1.905) 6(2.7,-0.635) 7(2.7,0.635) 8(2.7,1.905)
  silkscreen extent -2.92,-2.41 1.4,2.79, body extent -3,-2.46 3,2.46, height 1.75
SOP_8 [mm]
  rect 1.8x0.6 smd: 1(-2.825,1.905)
  oval 1.8x0.6 smd: 2(-2.825,0.635) 3(-2.825,-0.635) 4(-2.825,-1.905) 5(2.825,-1.905) 6(2.825,-0.635) 7(2.825,0.635) 8(2.825,1.905)
  silkscreen extent -4.44,-2.54 1.4,2.54, body extent -2.99,-2.45 3,2.45, height 1.6
SOT23-3 [mm] "SMD"
  rrect25% 1.23x0.6 smd paste+0 mask+0.102: 1(-1.06,0.95) 2(-1.06,-0.95) 3(1.06,0)
  silkscreen extent -0.13,-1.45 0.65,1.45, body extent -1.2,-1.45 1.2,1.45, height 1.11
SOT-23-6 [mm] "SMD"
  rect 1.15x0.6 smd: 1(-1.25,0.95) 2(-1.25,0) 3(-1.25,-0.95) 4(1.25,-0.95) 5(1.25,0) 6(1.25,0.95)
  silkscreen extent -2.52,-1.4 0,1.4, body extent -1.4,-1.45 1.4,1.45, height 1.45
SS54 [mm] "DIODE SCHOTTKY 40V 5A SMA"
  rect 2.5x1.7 smd: 1(-2.032,0) 2(2.032,0)
  silkscreen extent -3.18,-1.63 2.46,1.7, body extent -2.5,-1.36 2.5,1.34, height 2.25
SW-DIP-6x6mm [mm] "DIP Switch"
  round 1.498 hole 0.99: 1(1.255,-2.49) 2(5.755,-2.49)
  round 1.95 hole 1.3: S1(0,0) S2(7.01,0)
  silkscreen extent -0.08,-10.84 7.08,1.52, body extent -0.7,-10.95 7.71,1.42, height 7.01
SW-SMD-6x6mm [mm] "SMD"
  rect 1.55x1.3 smd: 1(-3.975,2.25) 1(3.975,2.25) 2(-3.975,-2.25) 2(3.975,-2.25)
  silkscreen extent -5.75,-2.67 2.67,2.67, body extent -4.5,-3.1 4.5,3.1, height 4.99
"TEST POINT" [mm]
  round 1.5 smd: 1(0,0)
  silkscreen extent -1.2,-1.2 1.2,1.2
"Test Point" [mm]
  round 1.5 smd: 1(0,0)
  silkscreen extent -1.2,-1.2 1.2,1.2
TPS5430 [mm]
  rect 1.8x0.6 smd: 1(-2.85,1.88)
  oval 1.8x0.6 smd: 2(-2.85,0.61) 3(-2.85,-0.66) 4(-2.85,-1.93) 5(2.8,-1.93) 6(2.8,-0.66) 7(2.8,0.61) 8(2.8,1.88)
  rect 2.2x3.1 smd: 9(-0.025,-0.025)
  silkscreen extent -3.55,-2.16 1.52,2.92, body extent -3.02,-2.48 2.97,2.42, height 1.6
Type-C-16Pins [mm]
  rect 0.6x1.5 smd: A1(-3.202,4) A4(-2.402,4) B1(3.198,4) B4(2.398,4)
  rect 0.3x1.5 smd: A5(-1.252,4) A6(-0.252,4) A7(0.248,4) A8(-1.752,4) B5(1.748,4) B6(0.748,4) B7(-0.752,4) B8(1.248,4)
  oval 1x2.5 hole 0.7 slot 1.7 at 90 deg: SHIELD(-4.322,3.083) SHIELD(4.318,3.083)
  oval 1x2 hole 0.7 slot 1.4 at 90 deg: SHIELD(-4.322,-1.067) SHIELD(4.318,-1.067)
  round 0.65 hole 0.65 mask+0.102: SHIELD(-2.892,2.583) SHIELD(2.888,2.583)
  silkscreen extent -4.68,-4 4.69,5.43, body extent -4.47,-3.65 4.47,4.25, height 3.21
"VR 3X3" [mm]
  rect 1.2x1.2 smd mask+0.051: 1(-1,-1.6) 3(1,-1.6)
  rect 1.6x1.5 smd mask+0.051: 2(0,1.55)
  body extent -1.1,-1.56 1.1,1.25, height 0.81
YELLOW_LED_0805 [mil] "SMD"
  rect 50x55 smd: 1(0,0)
  rrect50% 50x55 smd: 2(90,0)
  silkscreen extent -40,-45 135,45, body extent 5,-25 85,25, height 43

## Part data
C1 C2 C3 C4 C5 C7 C8 C9 C10 C13 C14 C15 C16 C17 C18 C19 C20 C21 C22 C23 C24 C25 C26 C27 C28 C29 C30 C31 C32 C33 C34 C35 C36 C37 C38 C40 C41 C42 C43 C44 C45 C46 C47 C48 C49 C50 C51 C54 C55 C56 C57 C58 C59 C60 C61 C62 C63 C64: library part CAPACITOR, "CAPACITOR SMD - KEMET"
C6 C11 C12: library part Alu_Capacitor
COM1: "HR911105A"
D1 D2 D5: "DIODE SCHOTTKY 40V 5A SMA", Supplier Part Number 1=08X3002, Supplier 1=Newark
D3 D4: "TVS Diode, SM712 Series, 31V Clamp, 600W Peak Pulse, Surface Mount, SOT23-3"
D6: "17.5V Clamp 12A (8/20µs) Ipp Tvs Diode Surface Mount SOT-23-6"
D7: "45.4V Clamp 8.8A Ipp Tvs diode surface mount"
D9 D10 D11 D12 D13 D14 D15 D16: "TVS, 400W, 5V, Unidirectional"
DC1: "Jack DC IN (Hole)"
EN1: "Bourns PEC11R-4015F-S0024"
F1 F2 F3 F4: "Fuse Resettable 30V/0.2A; Size 4.55 x 3.24mm"
FR1: library part "Ferrite Beads", "SMD"
Fuse1: library part Fuse, "Nano2 SMD FF submin fuse w/holder, 4A"
JP1: "JUMP 3 PINS DIP", Supplier Part Number 1=TS-103-G-A, Supplier 1=Avnet
JP2: "JUMP 5 PINS DIP", Supplier Part Number 1=TSW-105-23-L-S-LL, Supplier 1=Avnet
KF1: "KF Terminal Block Plug-in"
L1 L2: library part Inductor_1_SMD
LCD1: "LCD 2004"
LED1 LED2 LED3 LED4 LED5 LED6 LED7 LED11 LED12 LED15: library part LED_SMD, "LED SMD"
MH1 MH2 MH3 MH4: "Mounting hole"
Q6 Q7: "Bipolar (BJT) Transistor NPN 25 V 1.5 A 100MHz 300 mW Surface Mount SOT-23-3"
R1 R2 R3 R4 R5 R6 R7 R8 R9 R10 R11 R12 R13 R14 R15 R16 R17 R18 R19 R20 R21 R22 R23 R24 R25 R26 R27 R28 R29 R30 R31 R32 R33 R34 R35 R36 R37 R38 R39 R40 R41 R42 R43 R44 R45 R46 R49 R50 R51 R56 R61 R65 R66 R68 R69 R70 R72 R74 R75 R76 R78 R79 R80 R81 R82 R83: library part RESISTOR, "Resistor SMD - YAGEO"
SD1: "Micro SD Card Connector, 9 Positions, Connector and Ejector, Push In, Auto Eject Out, Surface Mount, 0.95 mm Height Above Board, Gold Flash"
SW1: "Switch 3 Pins"
SW2 SW8 SW9: "SMD Button", Supplier Part Number 1=35AH5160, Supplier 1=Newark
SW3: "Switch DIP ON OFF SPST 3 Flush Slide 0.1A 20VDC Gull Wing 2000Cycles 2.54mm SMD T/R"
SW5 SW6 SW7: "DIP Button 4 Pins"
TP1 TP2 TP3 TP5 TP6 TP8 TP10 TP11: library part "TEST POINT", "Test Point", Supplier Part Number 1=36-5014-ND, Supplier 1=Digikey
U1: "Buck DC to DC Converter"
U2: "Buck Converter"
U3: "Isolated - Converter"
U4: "Hardwired TCP/IP embedded Ethernet controller"
U5 U10: "1/1 Transceiver Half RS422, RS485"
U6 U7 U8: "Dual-Channel Digital Isolators, General Purpose Digital Isolator 2500Vrms 2 Channel 1Mbps 25kV/µs"
U13: "EEPROM Memory IC 256Kb (32K x 8), I2C Protocol"
U14: "Extremely Accurate I²C-Integrated RTC/TCXO/Crystal"
U15: "Bluetooth, WiFi 802.11b/g/n, Bluetooth v5.0 Transceiver Module 2.4GHz Antenna Not Included, U.FL Surface Mount"
U16: "USB to serial chip CH340"
USB1: "Type 16 Pins (Include 4 GND Pins)"
VBAT1: library part "Battery Base", "Battery Base CR2032"
VR1: library part "VARIABLE RESISTOR", "VR"
X1: library part "CRYSTAL 8MHz", "SMD CRYSTAL", Supplier Part Number 1=ECS-80-8-33Q-ADS, Supplier 1=Avnet

## Via types
v1: diameter 0.6, hole 0.3, SIGNAL_TOP to SIGNAL_BOTTOM, tented both sides, 457 vias
v2: diameter 0.6, hole 0.3, SIGNAL_TOP to SIGNAL_BOTTOM, 53 vias

## Nets (pads, with @x,y where several pads share a name; then routed paths per layer and width w, separated by ;. In a path a pad name is that pad's centre, name@x,y a point inside that pad or via, vN(x,y) a via of type N, cw(c..) or ccw(c..) an arc to the next point about the centre after c; other vN are vias at no path point)
3V3_SCL: R30.1 U13.6 U14.16 U15.5 | length 33.1
  SIGNAL_TOP w0.3: U15.5@74.392,71.261 74.392,69.487 R30.1@82.169,61.71 ; R30.1@82.291,61.587 83.349,60.53 85.66,60.53 U14.16@86.39,60.53 87.73,60.53 88.8,61.6 88.8,72.3 89.875,73.375 89.875,73.385 90.025,73.535 U13.6@90.5,73.535
3V3_SDA: R51.1 U13.5 U14.15 U15.4 | length 30.8
  SIGNAL_TOP w0.3: U15.4@75.662,71.261 75.815,71.108 75.815,70.31 84.325,61.8 U14.15@86.3,61.8 ; U14.15@86.39,61.8 87.7,61.8 88.1,62.2 88.1,72.9 89.855,74.655 90.35,74.655 U13.5@90.5,74.805
+3.3V: C1.1 C2.1 C9.2 C11.1 C16.2 C17.2 C35.2 C36.2 C37.2 C38.2 C40.1 C54.2 C55.2 C59.1 C61.1 C63.2 C64.2 FR1.1 JP2.01 L2.2 R3.1 R9.1 R10.2 R11.2 R25.1 R26.2 R27.2 R28.2 R30.2 R31.1 R32.1 R36.1 R37.1 R40.1 R41.1 R51.2 R61.1 R65.2 R66.2 R68.2 R69.2 R70.2 R72.1 R74.2 R78.1 R81.1 SD1.4 TP5.1 U2.3 U4.28 U6.1 U7.1 U8.1 U13.8 U14.2 U15.2 U16.16 | length 401.1
  SIGNAL_TOP w0.295: C16.2@41.189,67.364 41.55,67.725 U4.28@41.55,72.32
  SIGNAL_TOP w0.3: U14.2@95.7,61.8 97.4,61.8 98.025,62.425 98.025,69.225 101.2,72.4 v2@112.344,72.4 ; C37.2@98.325,63.1 C37.2@98.337,63.112
  SIGNAL_TOP w0.35: R78.1@45.975,47.1 45.979,47.096 47.646,47.096 v1(47.65,47.092)
  SIGNAL_TOP w0.38: R11.2@53.6,67.675 53.862,67.413 54.287,67.413 R31.1@55.253,66.447
  SIGNAL_TOP w0.4: R9.1@33.74,63.185 36.285,63.185 37.9,64.8 37.9,67.432 ; FR1.1@36.6,67.39 36.642,67.432 37.9,67.432 ; C16.2@41.136,67.311 40.96,67.488 40.113,67.488 v1(40.1,67.5) 40.088,67.488 39.04,67.488 38.863,67.311 38.742,67.432 37.9,67.432 ; R74.2@47.4,31 v2(47.4,32.4) ; R74.2@47.4,31 R66.2@56.388,31.001 ; v1(51.181,70.866) 53.51,68.537 53.51,67.765 R11.2@53.6,67.675 ; R25.1@52.82,108.484 52.877,108.428 53.588,108.428 54.856,107.159 54.856,107.134 55.081,106.909 R32.1@55.106,106.909 ; R32.1@55.118,106.737 55.333,106.952 55.953,106.952 56.261,107.259 56.261,107.823 56.745,108.307 57.24,108.307 R28.2@57.392,108.459 R27.2@59.183,108.459 ; R66.2@56.437,31 R66.2@56.388,31.001 ; R68.2@60.5,34.975 59.275,34.975 57.725,33.425 57.725,31.275 ; JP2.01@61,78.2 63.5,80.7 63.5,107.051 62.441,108.109 62.441,108.132 62.114,108.459 R26.2@62.091,108.459 ; R3.1@74.5,80.925 74.5,79.6 75.595,78.505 76.495,78.505 TP5.1@76.6,78.4 TP5.1@76.9,78.4 ; C9.2@76.715,76 C55.2@78.493,76 ; R69.2@79.6,40.375 80.825,40.375 81.5,39.7 81.5,32.8 80.551,31.851 79.726,31.851 79.7,31.825 R70.2@79.6,31.825 79.6,30.9 77,28.3 60.7,28.3 57.725,31.275 ; C11.1@81.788,79.242 C11.1@82.2,78.83 ; R30.2@82.169,60.16 82.246,60.16 82.614,59.792 92.292,59.792 94.3,61.8 U14.2@95.7,61.8 ; R51.2@82.2,65.475 C11.1@82.2,78.83 ; C11.1@82.2,79.13 C11.1@82.2,78.83 ; U13.8@90.5,70.995 90.52,71.015 91.515,71.015 92.7,72.2 C35.2@92.7,76.5 ; v2@112.344,72.4 112.383,72.362 v2@112.5,72.362 ; v2@112.608,72.362 113.197,71.772 R37.1@113.197,70.847 ; R41.1@113.175,68.4 R37.1@113.175,70.628 ; R61.1@113.275,61.646 R41.1@113.275,68.1 ; R37.1@113.275,70.663 115.587,70.663 115.849,70.401 115.849,68.553 C63.2@115.639,68.343 ; C40.1@113.424,52.578 117.694,52.578 117.698,52.583 118.623,52.583 118.9,52.86 118.9,55.7 115.5,59.1 v2@115.5,66.866 ; v2(115.514,66.793) C63.2@115.514,68.267 ; R66.2@56.388,31.001 57.451,31.001 57.725,31.275
  SIGNAL_TOP w0.6: v1(44.3,67.5) 44.349,67.549 45.074,67.549 R10.2@45.2,67.675 ; U16.16@49.359,42.926 49.369,42.936 49.454,42.936 v1(49.454,43.713) ; R25.1@52.82,108.459 R25.1@52.82,108.484 ; R27.2@59.183,108.459 R27.2@59.678,108.459 R26.2@62.091,108.459 ; TP5.1@76.9,78.359 76.941,78.4 v2(78.903,78.4) ; U15.2@78.202,71.261 78.202,72.929 78.723,73.45 78.773,73.45 78.973,73.65 C54.2@78.973,73.7 C55.2@78.973,76 78.903,76.07 v2(78.903,78.4) ; C11.1@81.788,79.242 81.788,78.9 81.288,78.4 v2(78.903,78.4) ; L2.2@89.535,79.017 90.275,78.277 C36.2@90.275,76.5 C35.2@92.525,76.5 ; U8.1@94.996,53.244 94.996,52.644 97.076,52.644 v2(97.155,52.565) ; U7.1@103.124,53.244 103.124,52.644 105.204,52.644 v2(105.283,52.565) ; U6.1@111.252,53.244 111.252,52.644 113.332,52.644 C40.1@113.411,52.565 v2(113.418,52.572)
  POWER w0.4: v2(47.4,32.4) 47.4,41.66 v1(49.454,43.713) ; v1(47.65,47.092) 49.416,45.326 49.416,43.802 v1@49.479,43.739
  POWER w0.5: v1(40.1,67.5) v1(44.3,67.5) ; v1(47.65,47.092) 44.3,50.442 v1(44.3,67.5) ; JP2.01@61,78.2 58.515,78.2 v1(51.181,70.866) 47.815,67.5 v1(44.3,67.5) ; JP2.01@61.3,78.3 61.381,78.381 78.884,78.381 v2(78.903,78.4) 83.9,78.4 86.6,81.1 108.813,81.1 112.5,77.413 v2(112.5,72.4)
  POWER w0.6: v2(97.155,52.565) v2(105.283,52.565) 113.411,52.565 v2(113.418,52.572)
  SIGNAL_BOTTOM w0.4: SD1.4@108.6,65.7 114.422,65.7 v2(115.514,66.793)
+3.3V_RJ45: C18.2 C19.2 C20.2 C21.2 C22.2 C23.2 FR1.2 R8.1 R16.2 R17.2 R19.1 U4.4 U4.8 U4.11 U4.15 U4.17 U4.21 | length 89.2
  SIGNAL_TOP w0.295: C19.2@33.775,74 34.718,74 35.968,75.25 U4.21@38.62,75.25 ; v2(33.775,78.4) 34.7,78.4 35.85,77.25 U4.17@38.62,77.25 ; C22.2@33.775,82.8 33.875,82.7 39.6,82.7 40.55,81.75 U4.11@40.55,80.68 ; C23.2@33.82,80.555 34.545,80.555 36.85,78.25 U4.15@38.62,78.25 ; v2(40.7,87.15) R19.1@40.7,87.225 40.712,87.225 42.05,85.887 U4.8@42.05,80.68 ; U4.4@44.05,80.68 44.05,84.375 v2(46.9,87.225) R16.2@46.956,87.169 ; R16.2@47.088,87.225 R17.2@48.9,87.225
  SIGNAL_TOP w0.4: v2(33.775,78.4) C23.2@33.775,80.6 C22.2@33.775,82.8
  SIGNAL_TOP w0.5: R8.1@31.64,63.21 31.69,63.21 31.94,63.46 31.94,63.51 33.011,64.581 v2(35.081,64.581) 35.1,64.6 35.59,64.6 36.115,65.125 36.115,65.29 36.435,65.61 FR1.2@36.6,65.61 ; C18.2@33.77,71.745 33.77,69.605 v2(33.775,69.6) ; C18.2@33.775,71.75 C19.2@33.775,74
  POWER w0.5: v2(35.081,64.581) 33.775,65.887 v2(33.775,78.4) 33.775,81.175 39.75,87.15 46.798,87.15 46.873,87.225 v2(46.9,87.225)
+5V: C3.1 C4.1 C10.1 C12.1 C13.1 C42.2 C43.2 D5.2 JP2.02 L1.2 LCD1.2 LCD1.15 R2.1 R5.1 TP6.1 U2.1 U3.2 VR1.1 | length 223.9
  SIGNAL_TOP w0.8: D5.2@34.532,44.7 34.982,45.15 35.55,45.15 v1(37.4,47) ; R2.1@74.8,92.875 74.788,92.887 74.788,93.888 76.066,95.166 76.566,95.166 v2(76.65,95.25) ; LCD1.15@78.359,104.394 78.359,107.581 78.778,108 v2(83.015,108) ; C12.1@81.6,89.027 81.54,89.027 C12.1@81.661,89.148 ; v2(111.201,107.839) 111.29,107.75 111.29,104.483 LCD1.2@111.379,104.394
  SIGNAL_TOP w1: 83.21,89.401 83.51,89.101 v2(85.8,89.101) 88.999,89.101 89.4,88.7 89.535,88.835 L1.2@89.535,88.923 ; L1.2@89.535,89.101 L1.2@90.195,89.101
  POWER w0.8: v1(37.4,47) 37.4,66.3 51.84,80.74 61.154,80.74 61.439,81.025 61.625,81.025 69.7,89.1 76.65,89.1 ; LCD1.15@78.359,104.394 78.359,96.959 v2(76.65,95.25) 76.65,89.1 ; v2(83.015,108) 111.04,108 v2(111.201,107.839) ; v2@85.7,89.1 76.65,89.1 ; v2@85.701,89.101 v2(85.8,89.101) 103.999,89.101 117.103,75.997 v2(117.103,47.6) ; U3.2@118.296,42.037 U3.2@118.392,42.037
  SIGNAL_BOTTOM w0.8: v2(117.103,47.6) 117.103,47.197 118.1,46.2 119.1,46.2 119.667,45.633 120.724,45.633 C3.1@120.764,45.593 ; U3.2@118.296,42.037 118.488,42.037 118.742,41.783 C13.1@120.764,41.783 C4.1@120.764,43.688 C3.1@120.764,45.276
+5V_RS485: C14.1 C31.1 C32.1 C33.1 C34.1 C41.1 C60.1 C62.1 R34.1 R35.1 R39.1 R50.1 R56.1 TP11.1 U3.4 U5.8 U6.8 U7.8 U8.8 U10.8 | length 113
  SIGNAL_TOP w0.4: U10.8@94.996,39.212 94.996,37.067 95.22,36.843 C34.1@97.409,36.843 99.4,36.843 ; R35.1@99.457,38.96 99.457,36.843 103.1,33.2 103.146,33.2 103.246,33.1 v2(103.3,33.1) ; R35.1@99.6,38.925 R34.1@102.9,38.925 ; v2@103.3,33.089 R39.1@105.27,33.089
  SIGNAL_TOP w0.6: v2(87.4,33.1) 87.5,33.2 R50.1@88.825,33.2 ; U8.8@94.996,47.594 94.996,47.892 97.13,47.892 97.138,47.9 v2(98.3,47.9) ; U7.8@103.124,47.594 103.124,47.892 C60.1@105.258,47.892 ; C60.1@105.283,47.892 v2(105.291,47.9) ; U5.8@111.252,39.212 111.252,36.97 C31.1@111.379,36.843 C32.1@113.538,36.843 118.182,36.843 U3.4@118.296,36.957 120.65,34.603 R56.1@120.65,33.541 120.709,33.6 122.049,33.6 122.4,33.249 122.4,30.2 121.117,28.917 120.217,28.917 TP11.1@120.1,28.8 ; U6.8@111.252,47.594 111.252,47.892 C41.1@113.411,47.892 113.467,47.836 114.264,47.836 114.7,47.4 114.7,44.8 114.2,44.3 v2(113.4,44.3)
  POWER w0.6: v2(87.4,33.1) 109.543,33.1 113.4,36.957 ; v2(98.3,47.9) 109.8,47.9 v2(113.4,44.3) 113.4,36.957 ; U3.4@118.296,36.957 113.4,36.957
+VCC: C6.1 C7.1 C8.1 Fuse1.2 R4.1 TP8.1 U1.7 | length 18.3
  SIGNAL_TOP w0.6: U1.7@100.234,92.964 101.969,92.964 102.212,92.721 R4.1@102.387,92.721
  SIGNAL_TOP w1: TP8.1@105.6,78.3 109.174,78.3 110.393,79.519 110.609,79.519 112.014,80.924 Fuse1.2@112.014,81.14 ; C6.1@105.989,86.437 109.693,82.733 111.295,82.733 112.039,81.989 Fuse1.2@112.039,81.572
A1: F2.2 KF1.2 | length 4.5
  SIGNAL_TOP w1: KF1.2@103.759,25.908 103.759,30.07 F2.2@104.004,30.315
A2: F4.2 KF1.4 | length 9.5
  SIGNAL_TOP w1: F4.2@87.875,30.188 87.875,27.187 89.144,25.918 KF1.4@93.843,25.918
B1: F1.2 KF1.1 | length 8.9
  SIGNAL_TOP w1: KF1.1@109.093,25.908 112.903,25.908 114.495,27.5 F1.2@114.495,30.315
B2: F3.2 KF1.3 | length 4.4
  SIGNAL_TOP w1: F3.2@98.493,30.188 98.677,30.003 KF1.3@98.677,25.91
CC1: R83.1 USB1.A5 | length 5.2
  SIGNAL_TOP w0.254: USB1.A5@34.861,38.463 36.322,38.463 37.737,39.878 R83.1@39.484,39.878
CC2: R82.1 USB1.B5 | length 5.1
  SIGNAL_TOP w0.254: USB1.B5@34.861,35.463 36.165,35.463 37.084,34.544 R82.1@39.611,34.544
DATA_D_N: D6.3 D6.4 U16.6 USB1.A7 USB1.B7 | length 12.6
  SIGNAL_TOP w0.27: USB1.B7@34.861,37.963 33.813,37.963 33.655,37.805 33.655,37.121 33.813,36.963 36.824,36.963 37.526,36.261 D6.3@38.501,36.261 43.199,36.261 43.514,36.576 U16.6@43.859,36.576
DATA_D_P: D6.1 D6.6 U16.5 USB1.A6 USB1.B6 | length 14.3
  SIGNAL_TOP w0.254: USB1.B6@34.861,36.463 36.181,36.463 v1(37.211,35.433)
  SIGNAL_TOP w0.27: USB1.A6@34.861,37.463 36.828,37.463 v1(37.211,37.846) 37.23,37.846 37.545,38.161 D6.6@40.726,38.161 ; D6.6@41.001,38.161 43.199,38.161 43.514,37.846 U16.5@43.859,37.846
  SIGNAL_BOTTOM w0.27: v1(37.211,35.433) v1(37.211,37.846)
DEBUG_EN: C56.2 D16.C R74.1 R75.1 SW8.2 U15.3 | length 90.4
  SIGNAL_TOP w0.4: SW8.2@35.56,25.472 37.288,27.2 D16.C@44.121,27.2 ; D16.C@44.2,27.485 44.2,27.795 44.75,28.345 44.845,28.345 45.937,29.437 46.358,29.437 v1(46.384,29.463) 47.387,29.463 R74.1@47.4,29.45 ; v1(51.105,43.739) 56.096,43.739 57.054,42.781 57.054,42.758 57.381,42.431 R75.1@57.404,42.431 ; C56.2@76.675,73.7 v1(76.775,73.7) 76.932,73.543 U15.3@76.932,71.261 ; U15.3@76.853,70.731 U15.3@76.857,70.726
  POWER w0.4: v1(46.384,29.463) 51.105,34.184 v1(51.105,43.739) 51.105,66.243 58.562,73.7 v1(76.775,73.7)